# Altium PCB CPU-board-multi-ver3.PcbDoc (part 1 of 3)
Units mil, origin at the board's own origin, x right, y up, seen from the top; angles counter-clockwise.
Board outline 3937 x 2607 mil, 6 copper layers (L1, Power, L2, L3, CommonGND, L4), stack 84 mil thick; 298 components, 216 nets, 1009 pads, 421 vias.
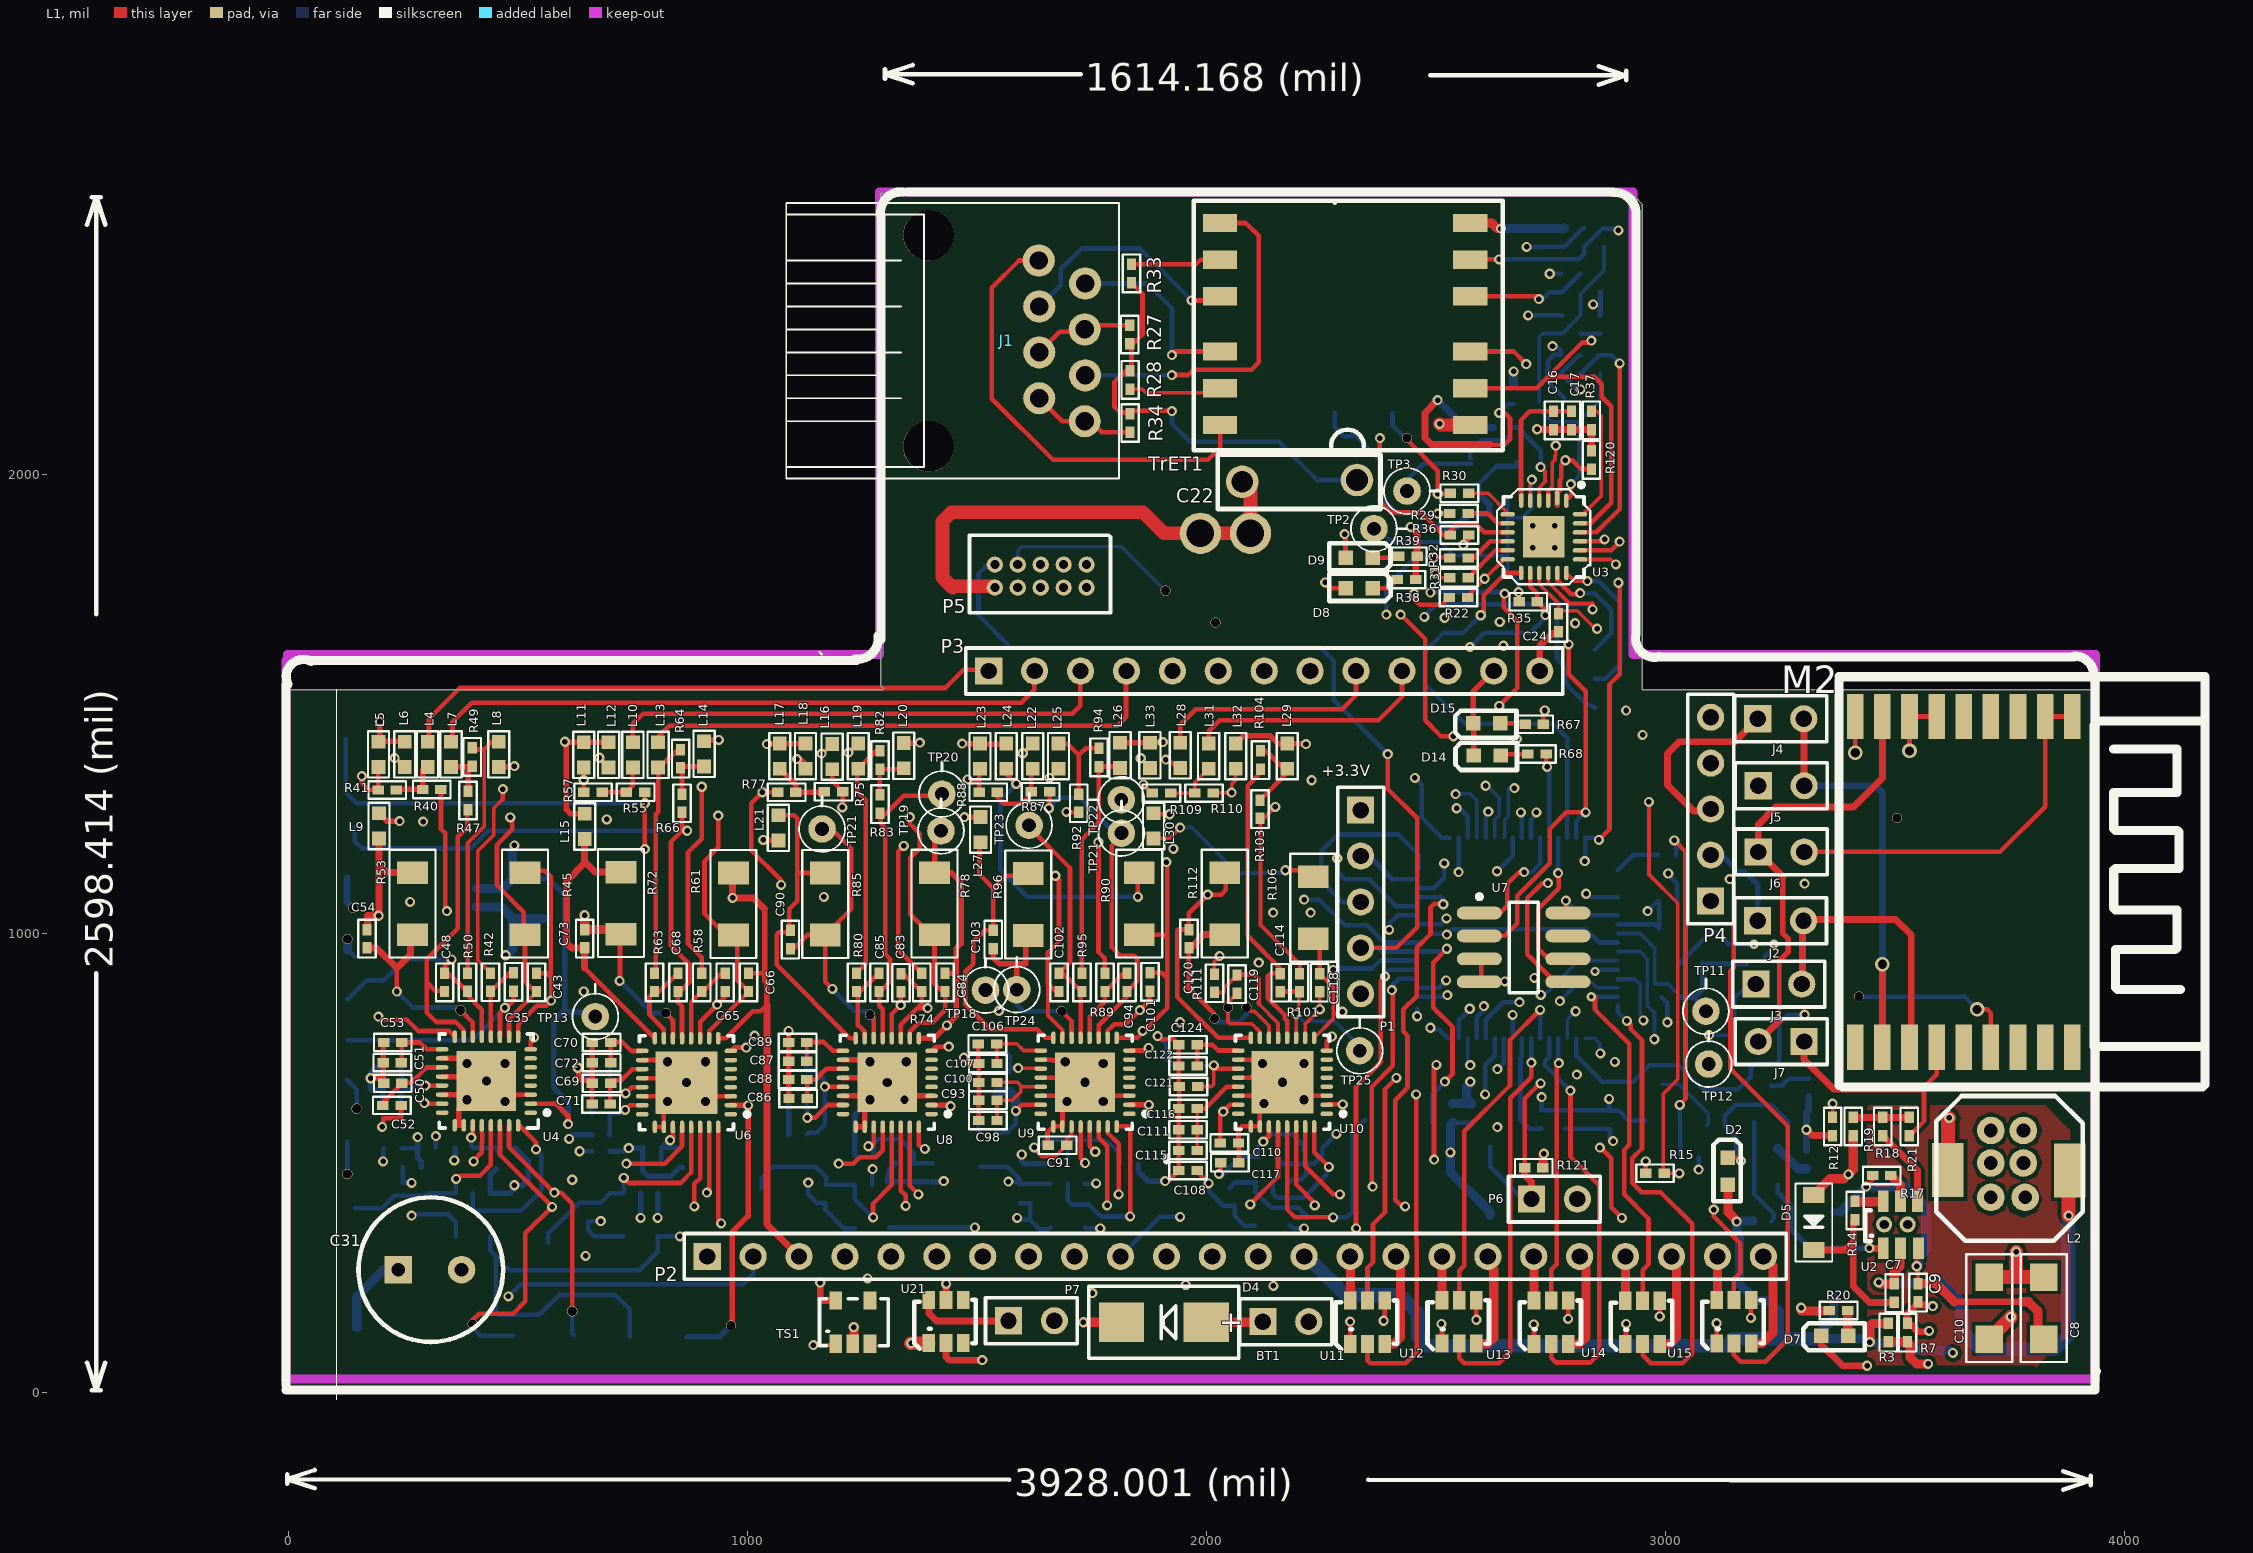
[diagram p0: L1 view]
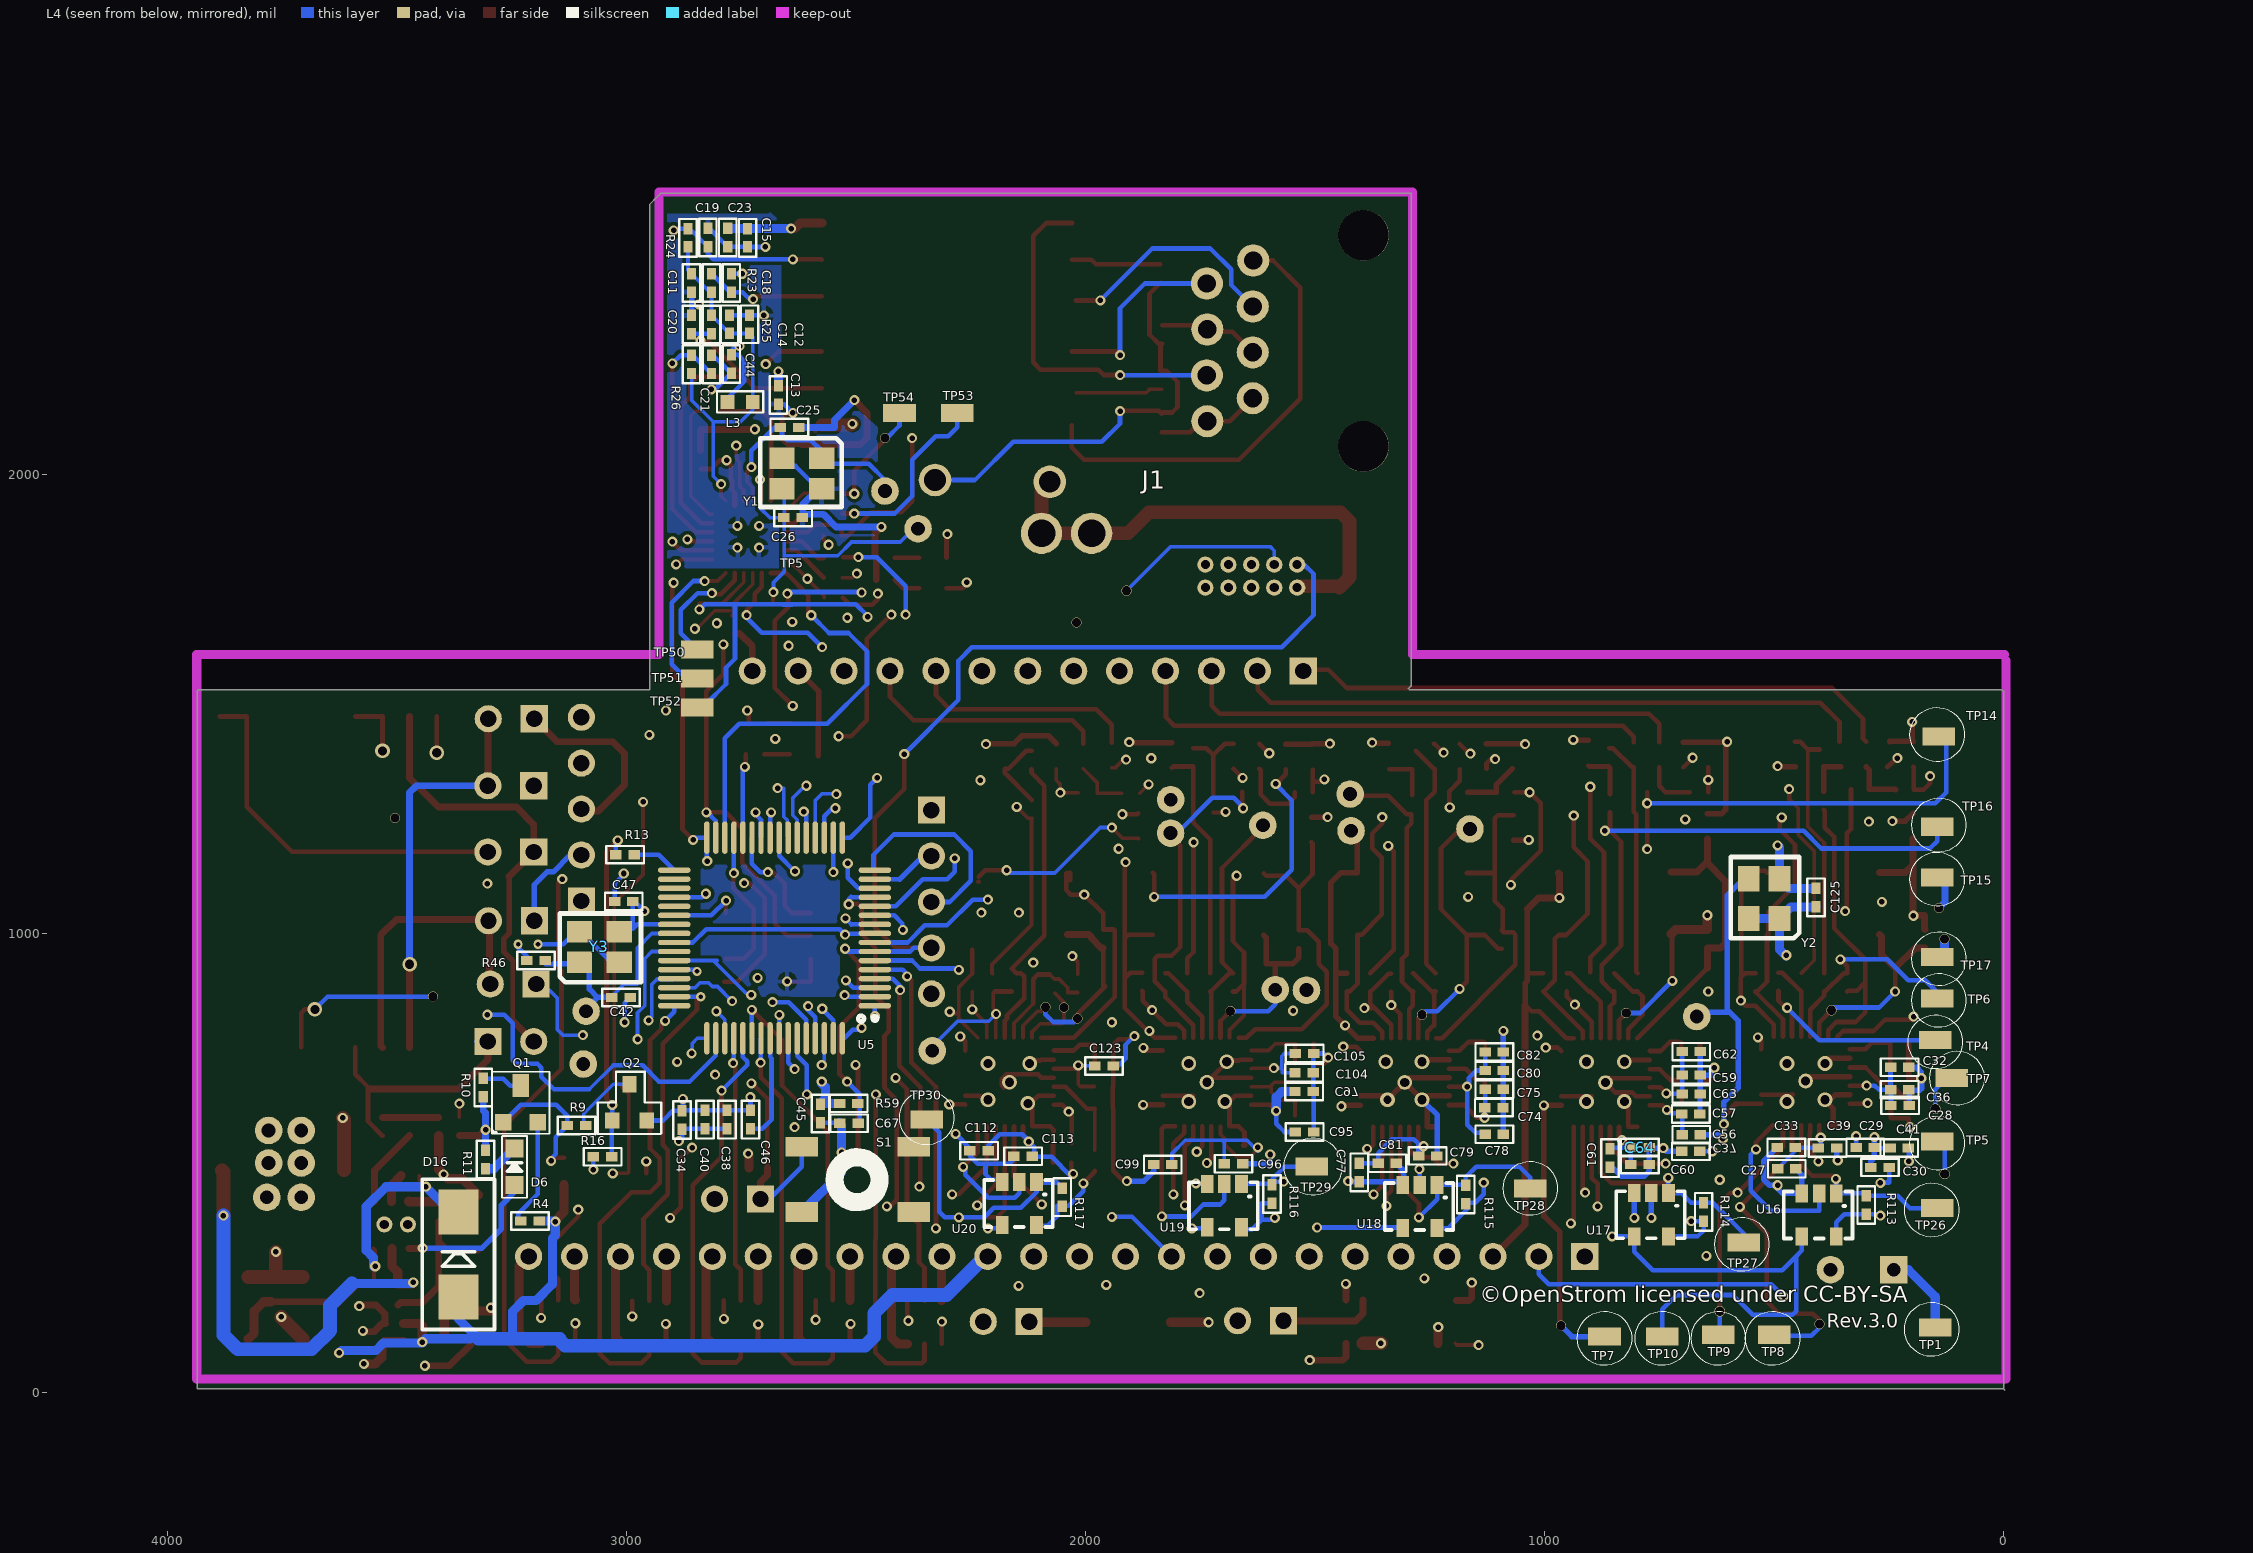
[diagram p1: L4 view, seen from below]
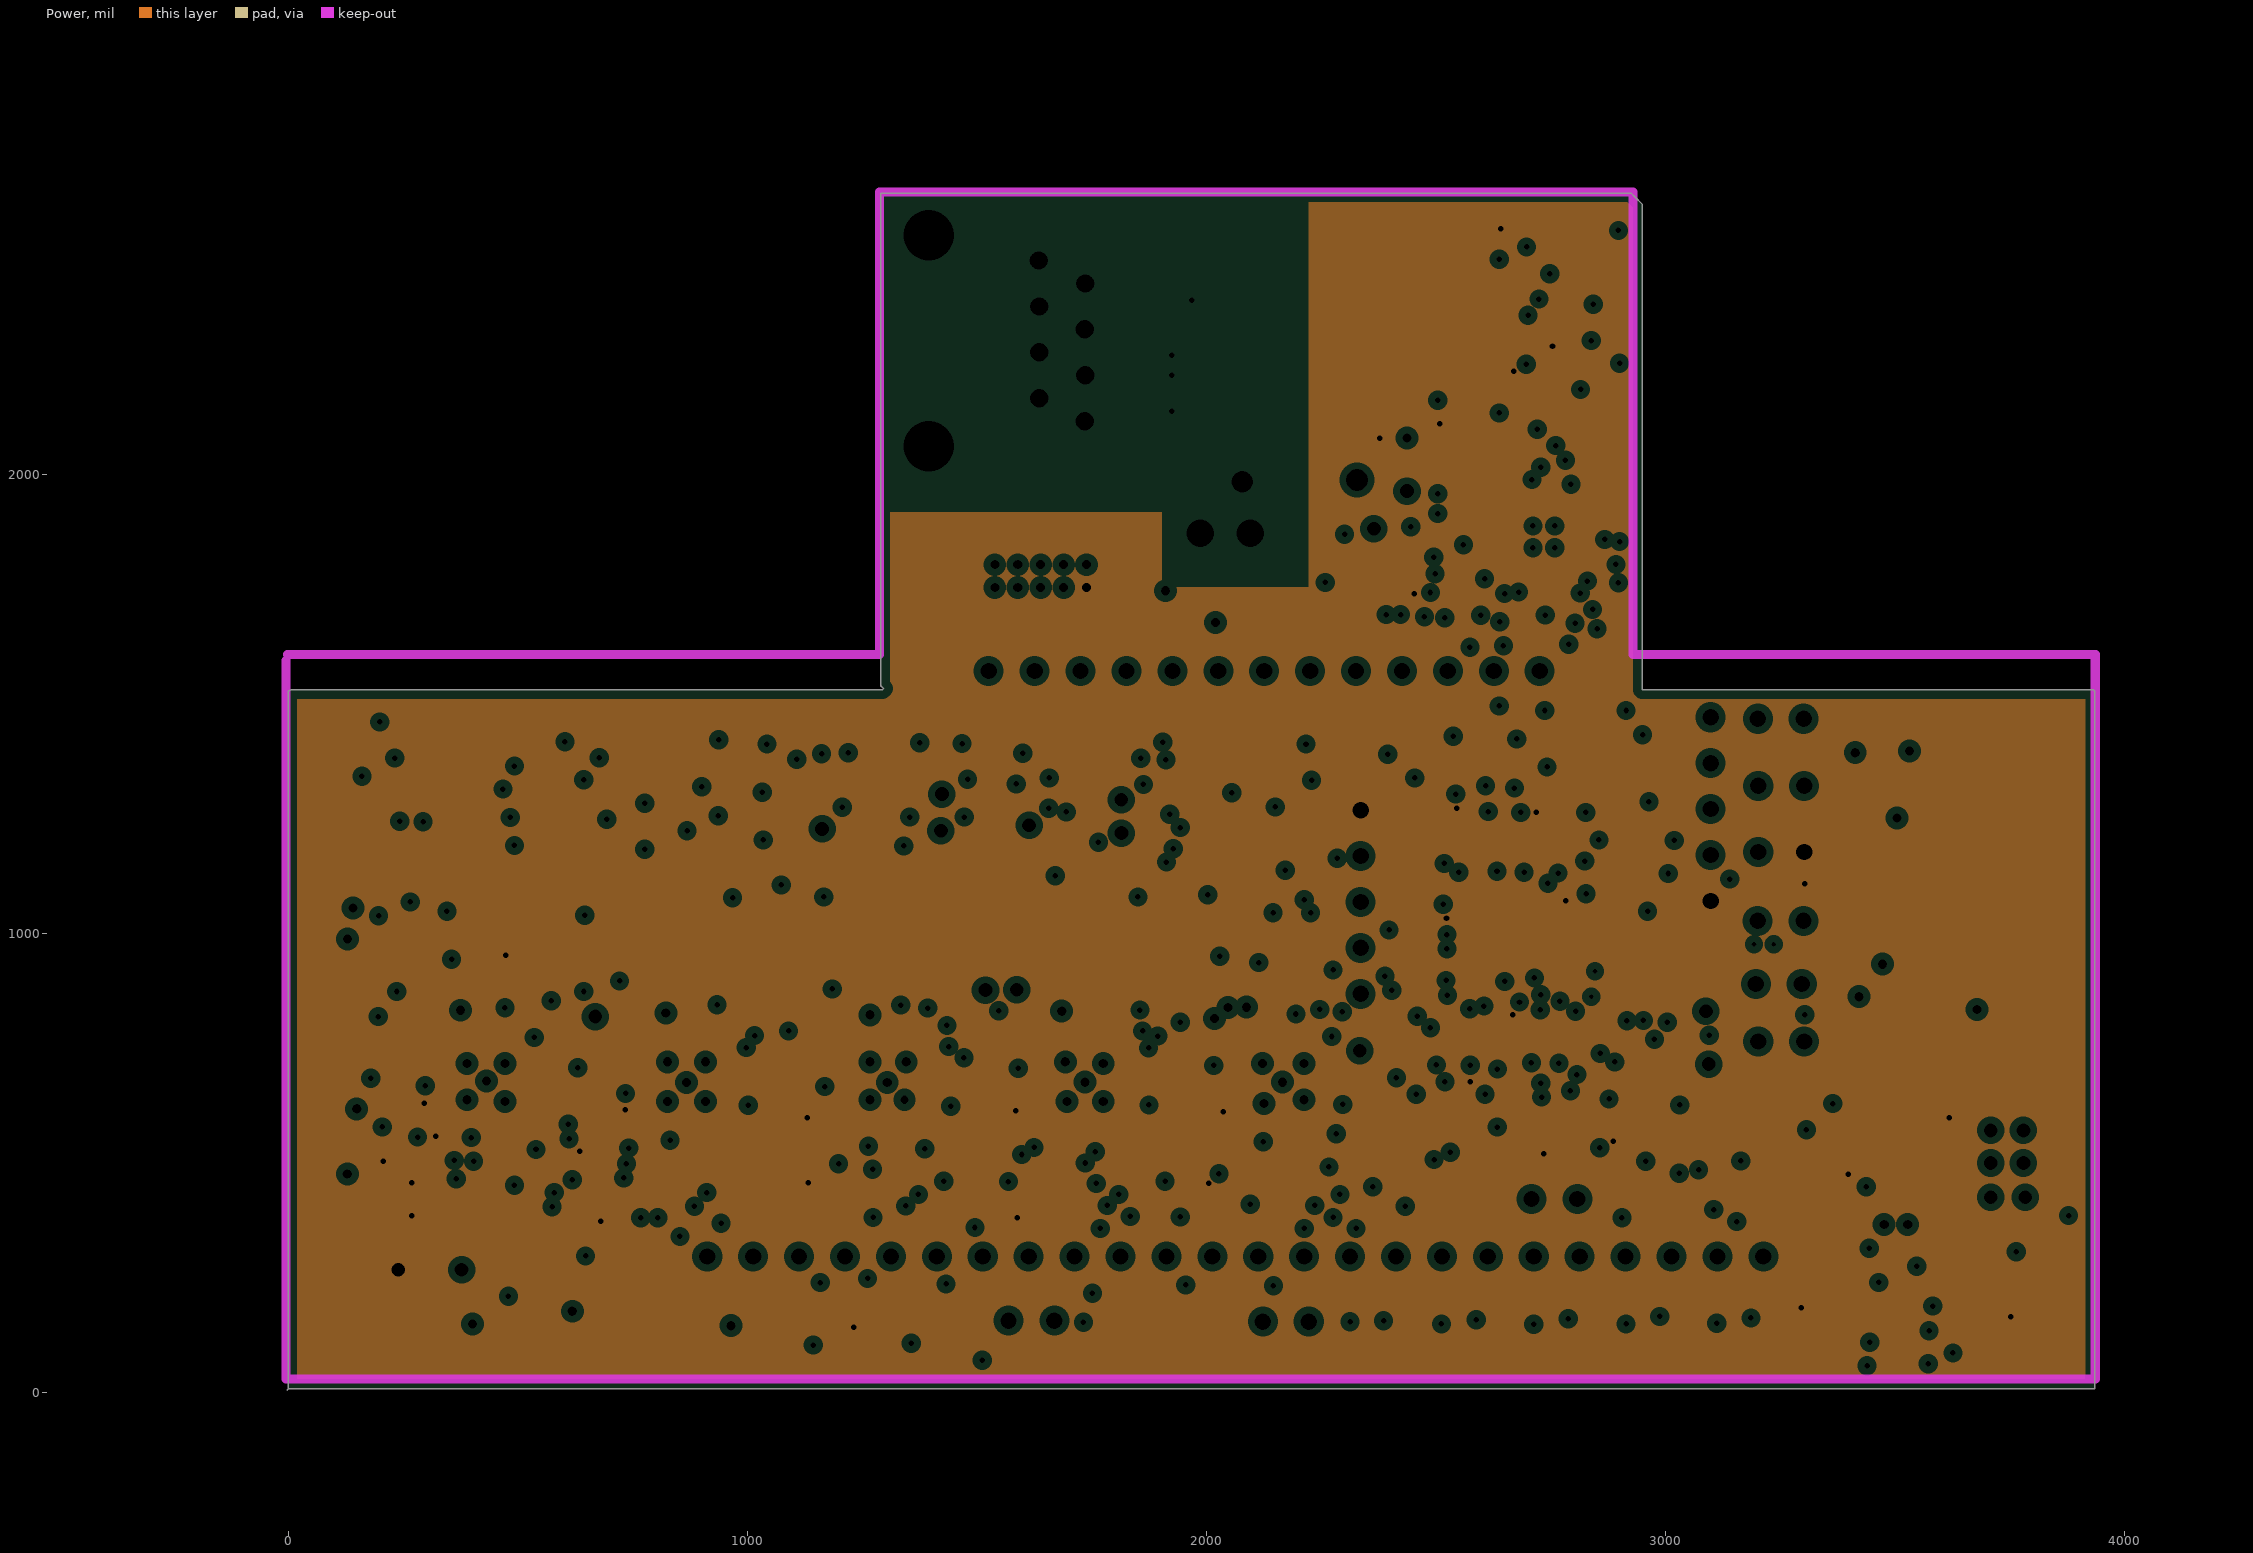
[diagram p2: Power, clearances drawn from the general rule]
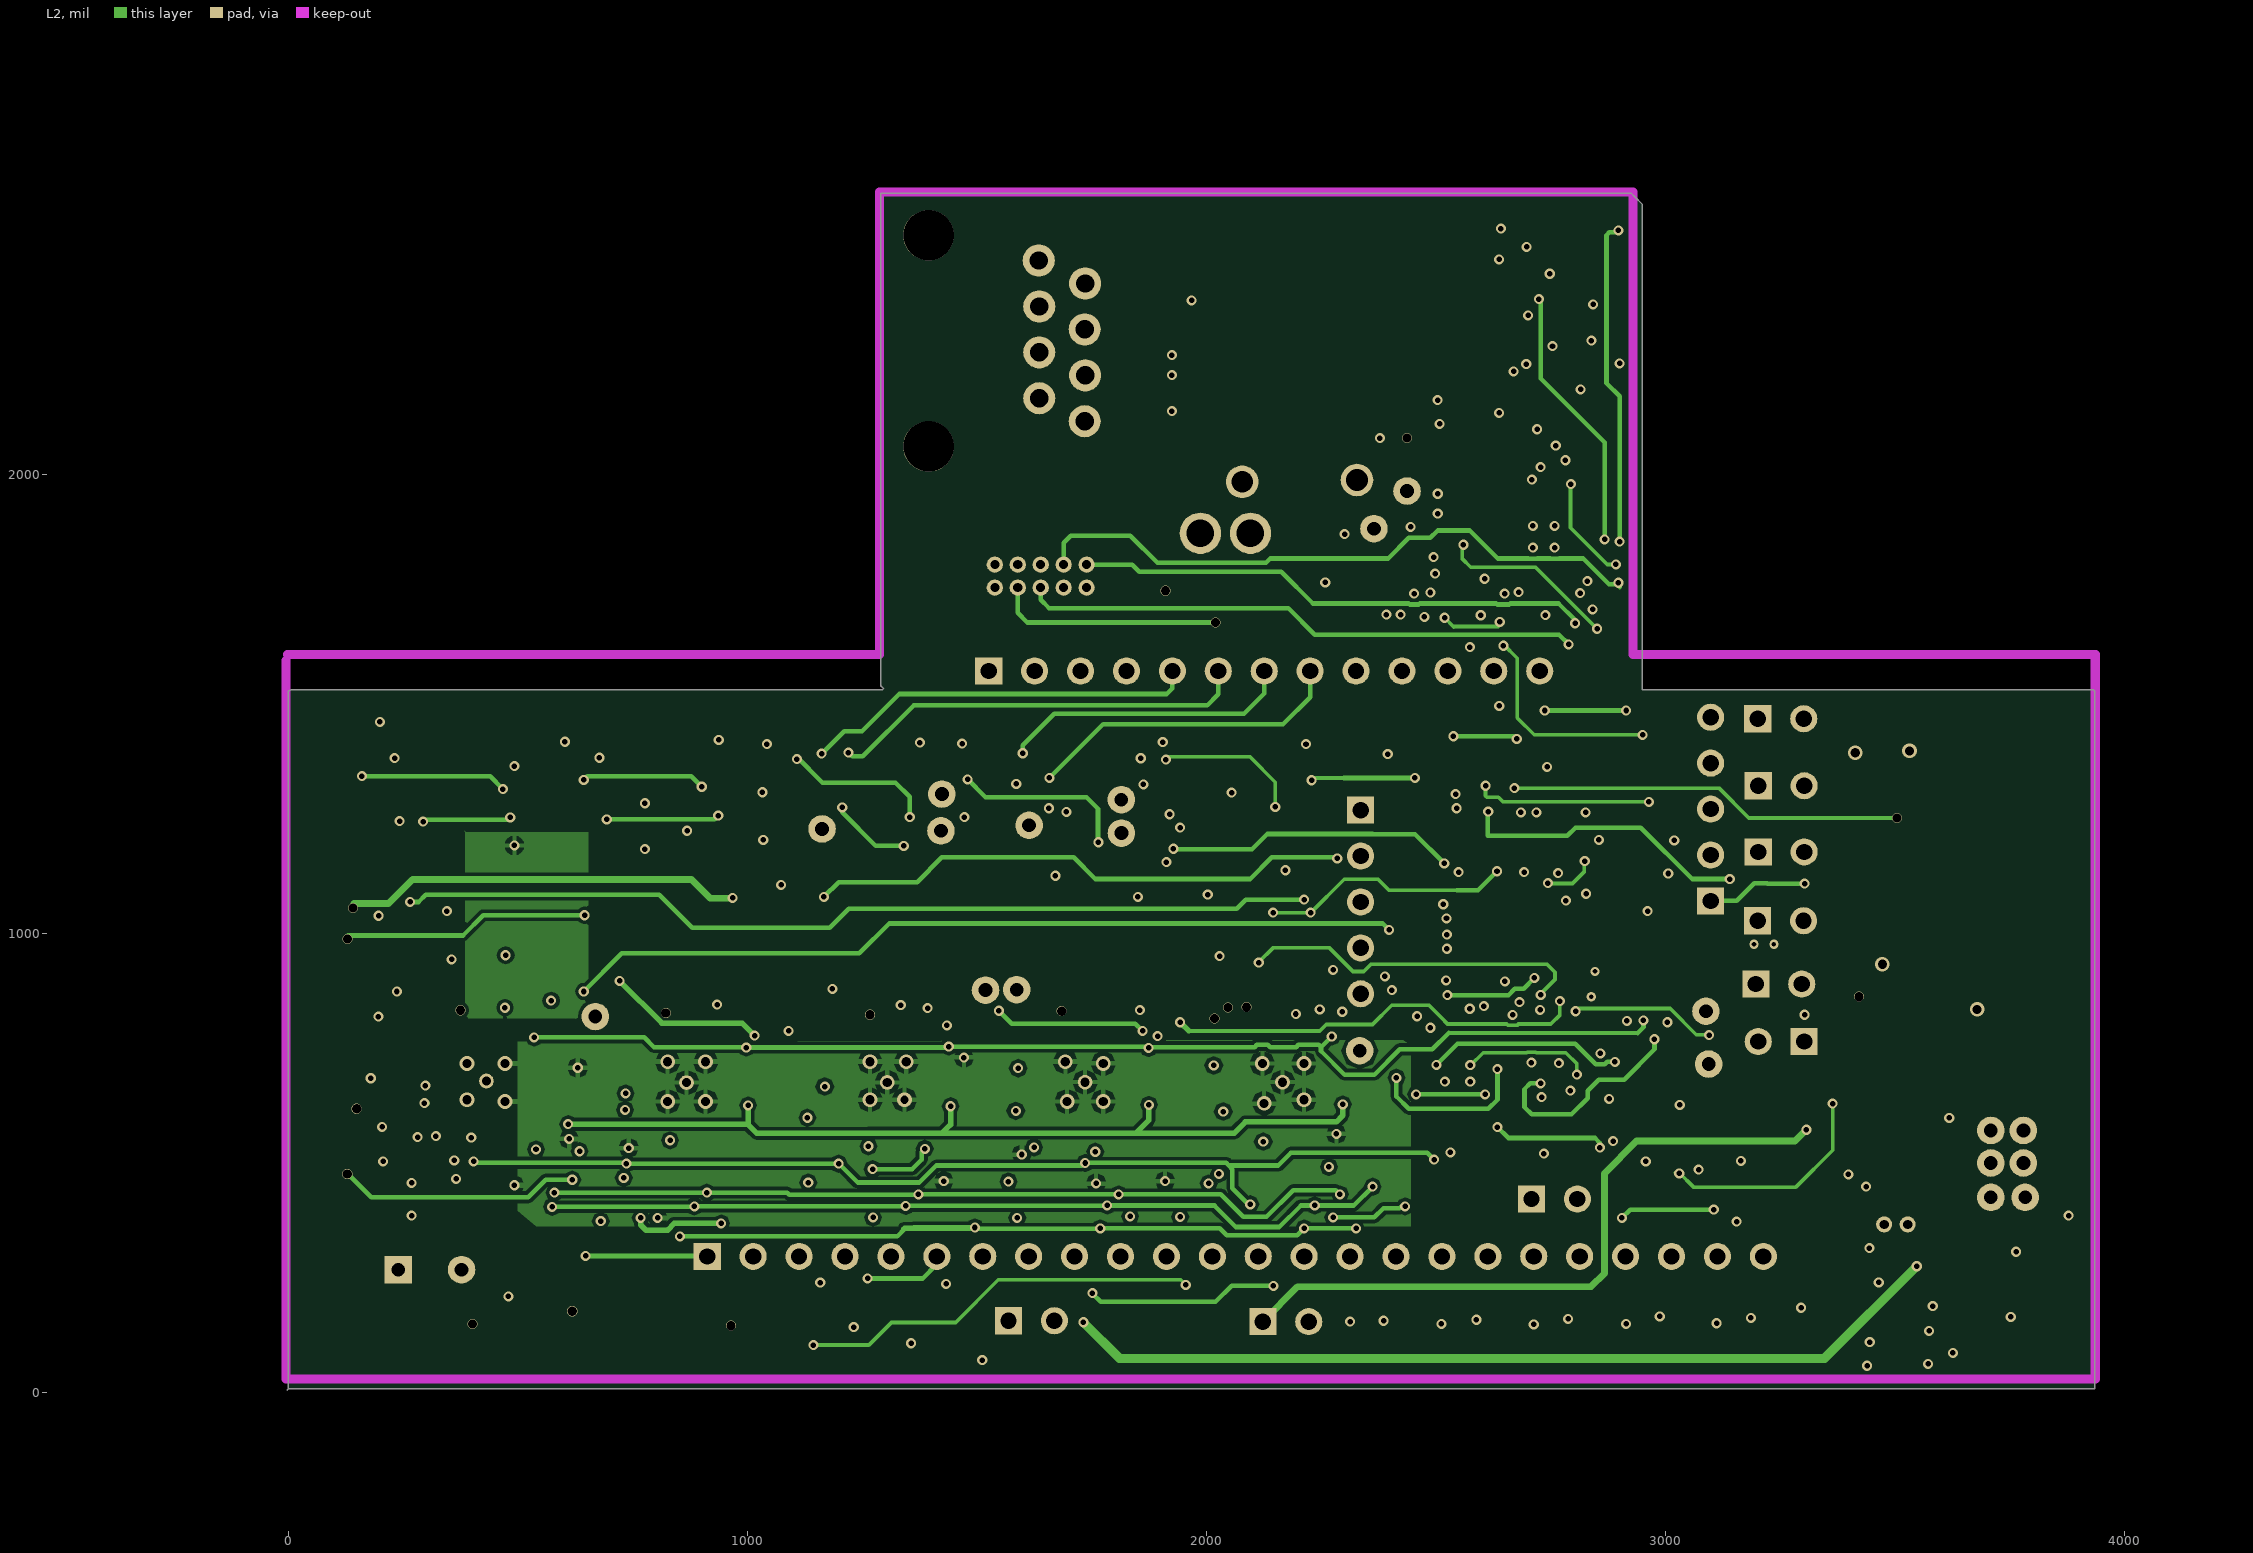
[diagram p3: L2]
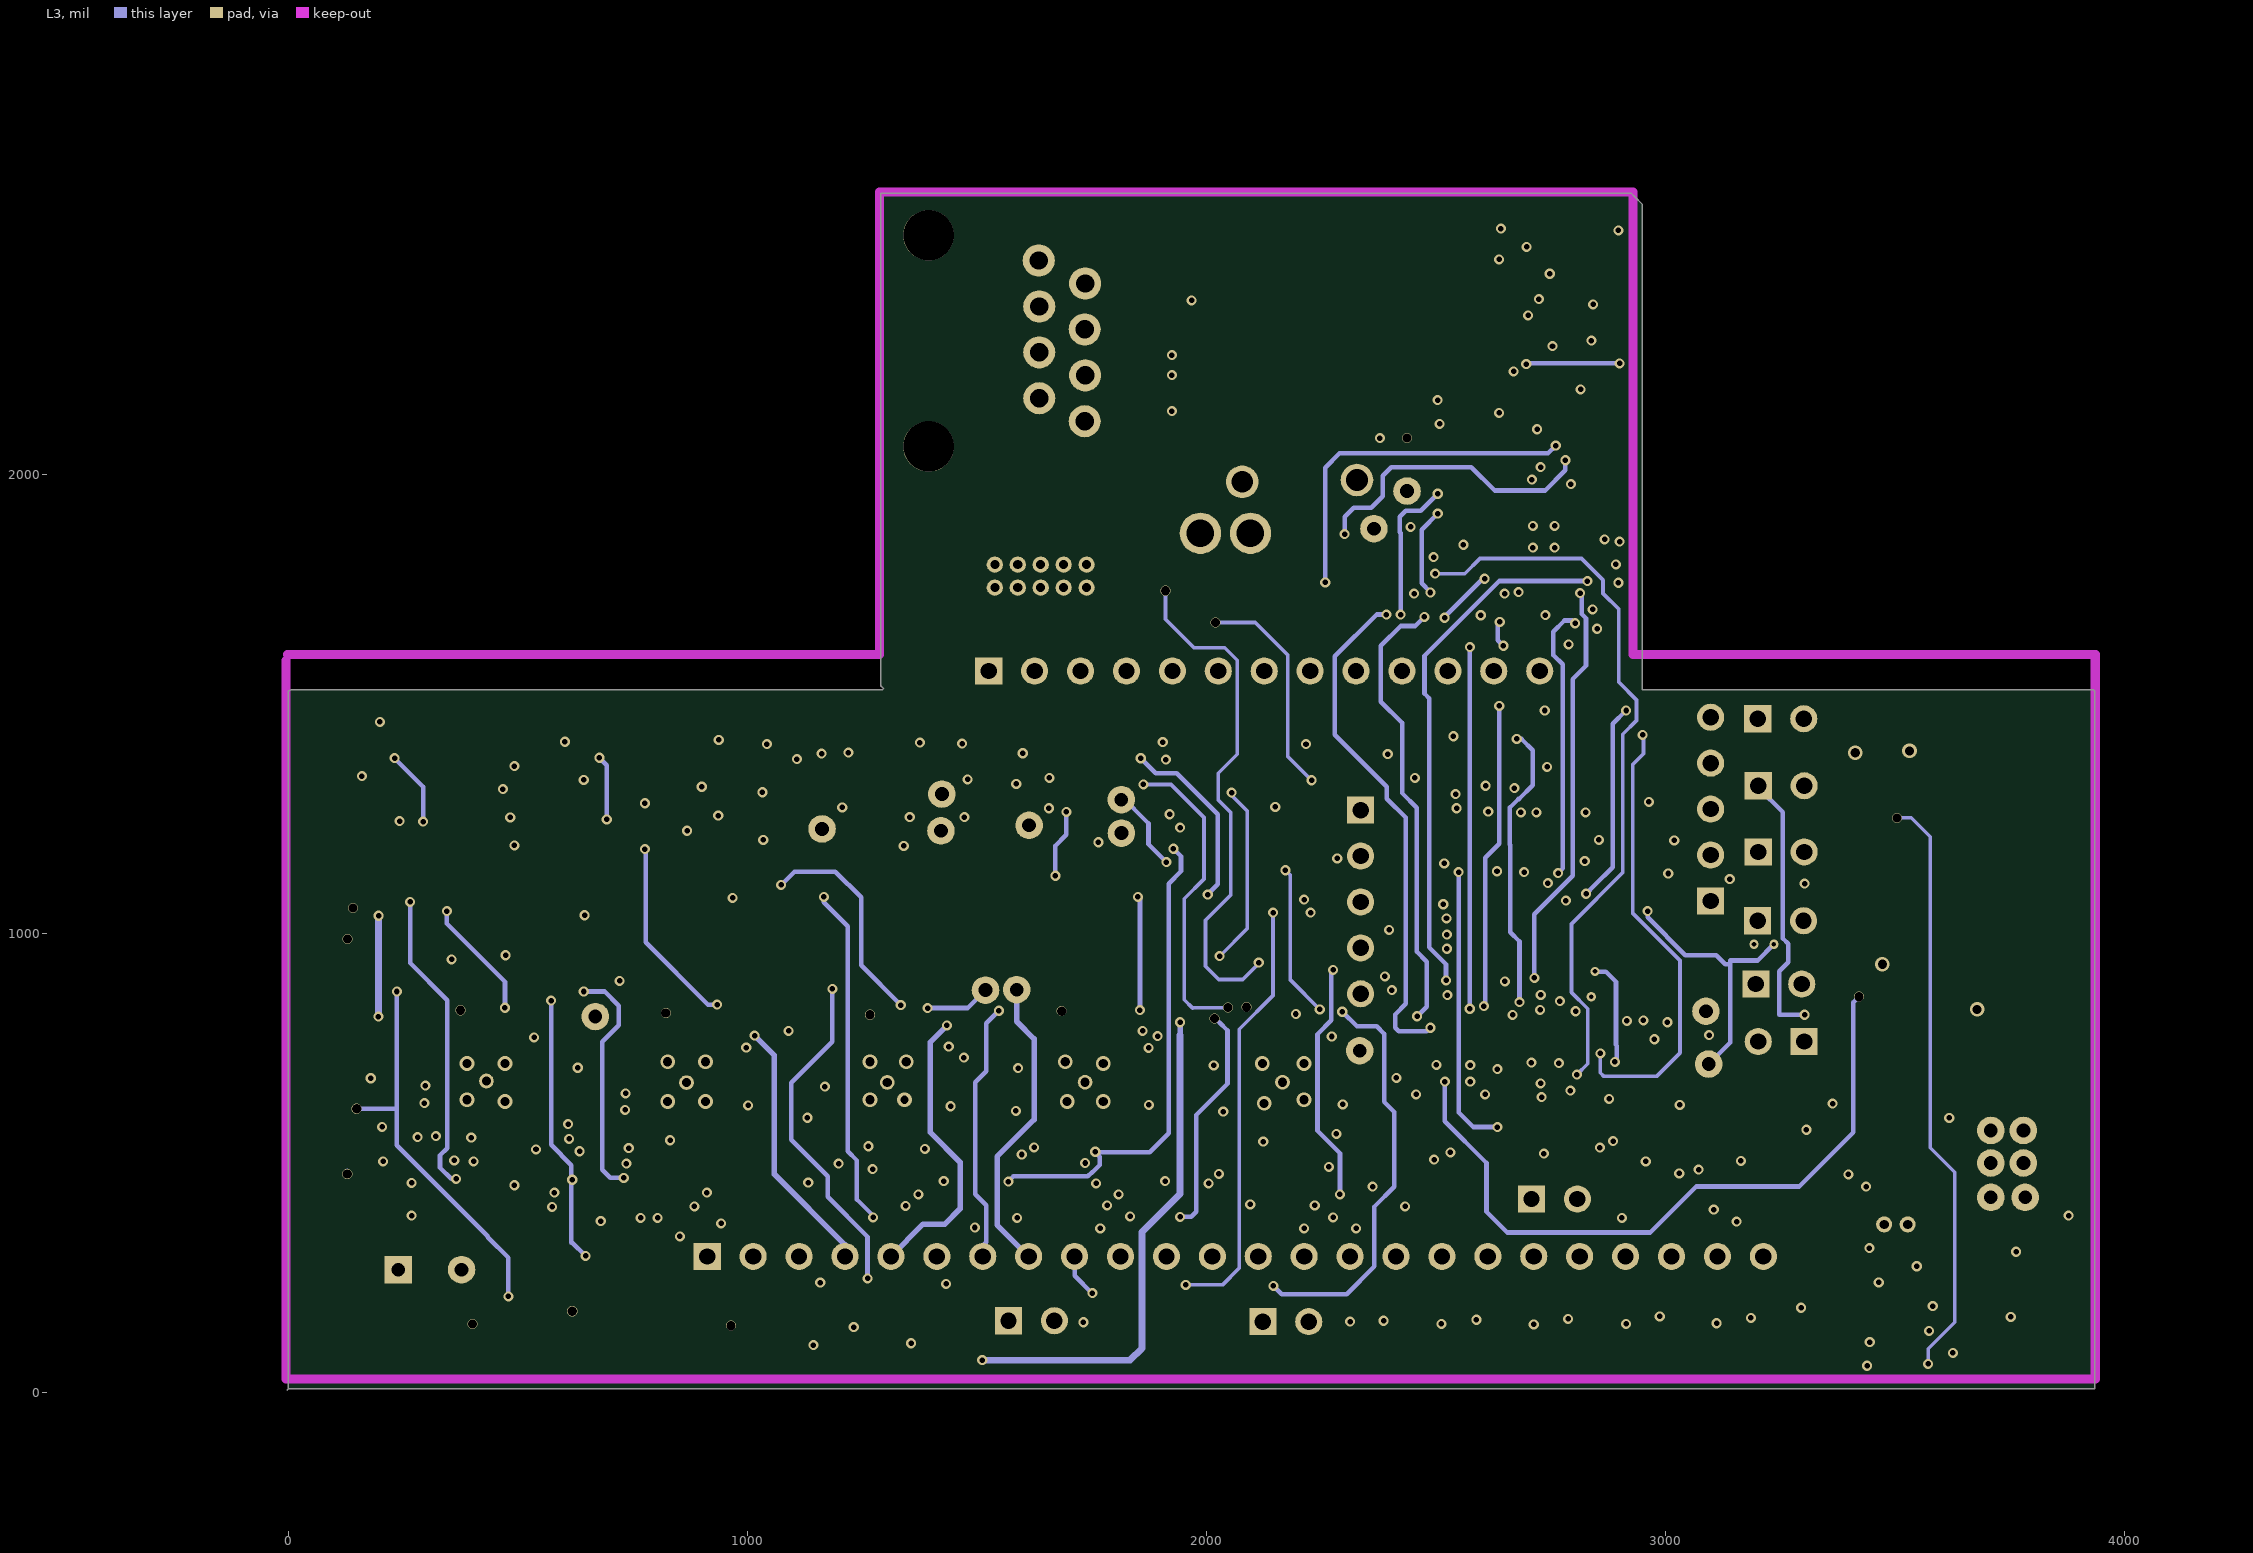
[diagram p4: L3]
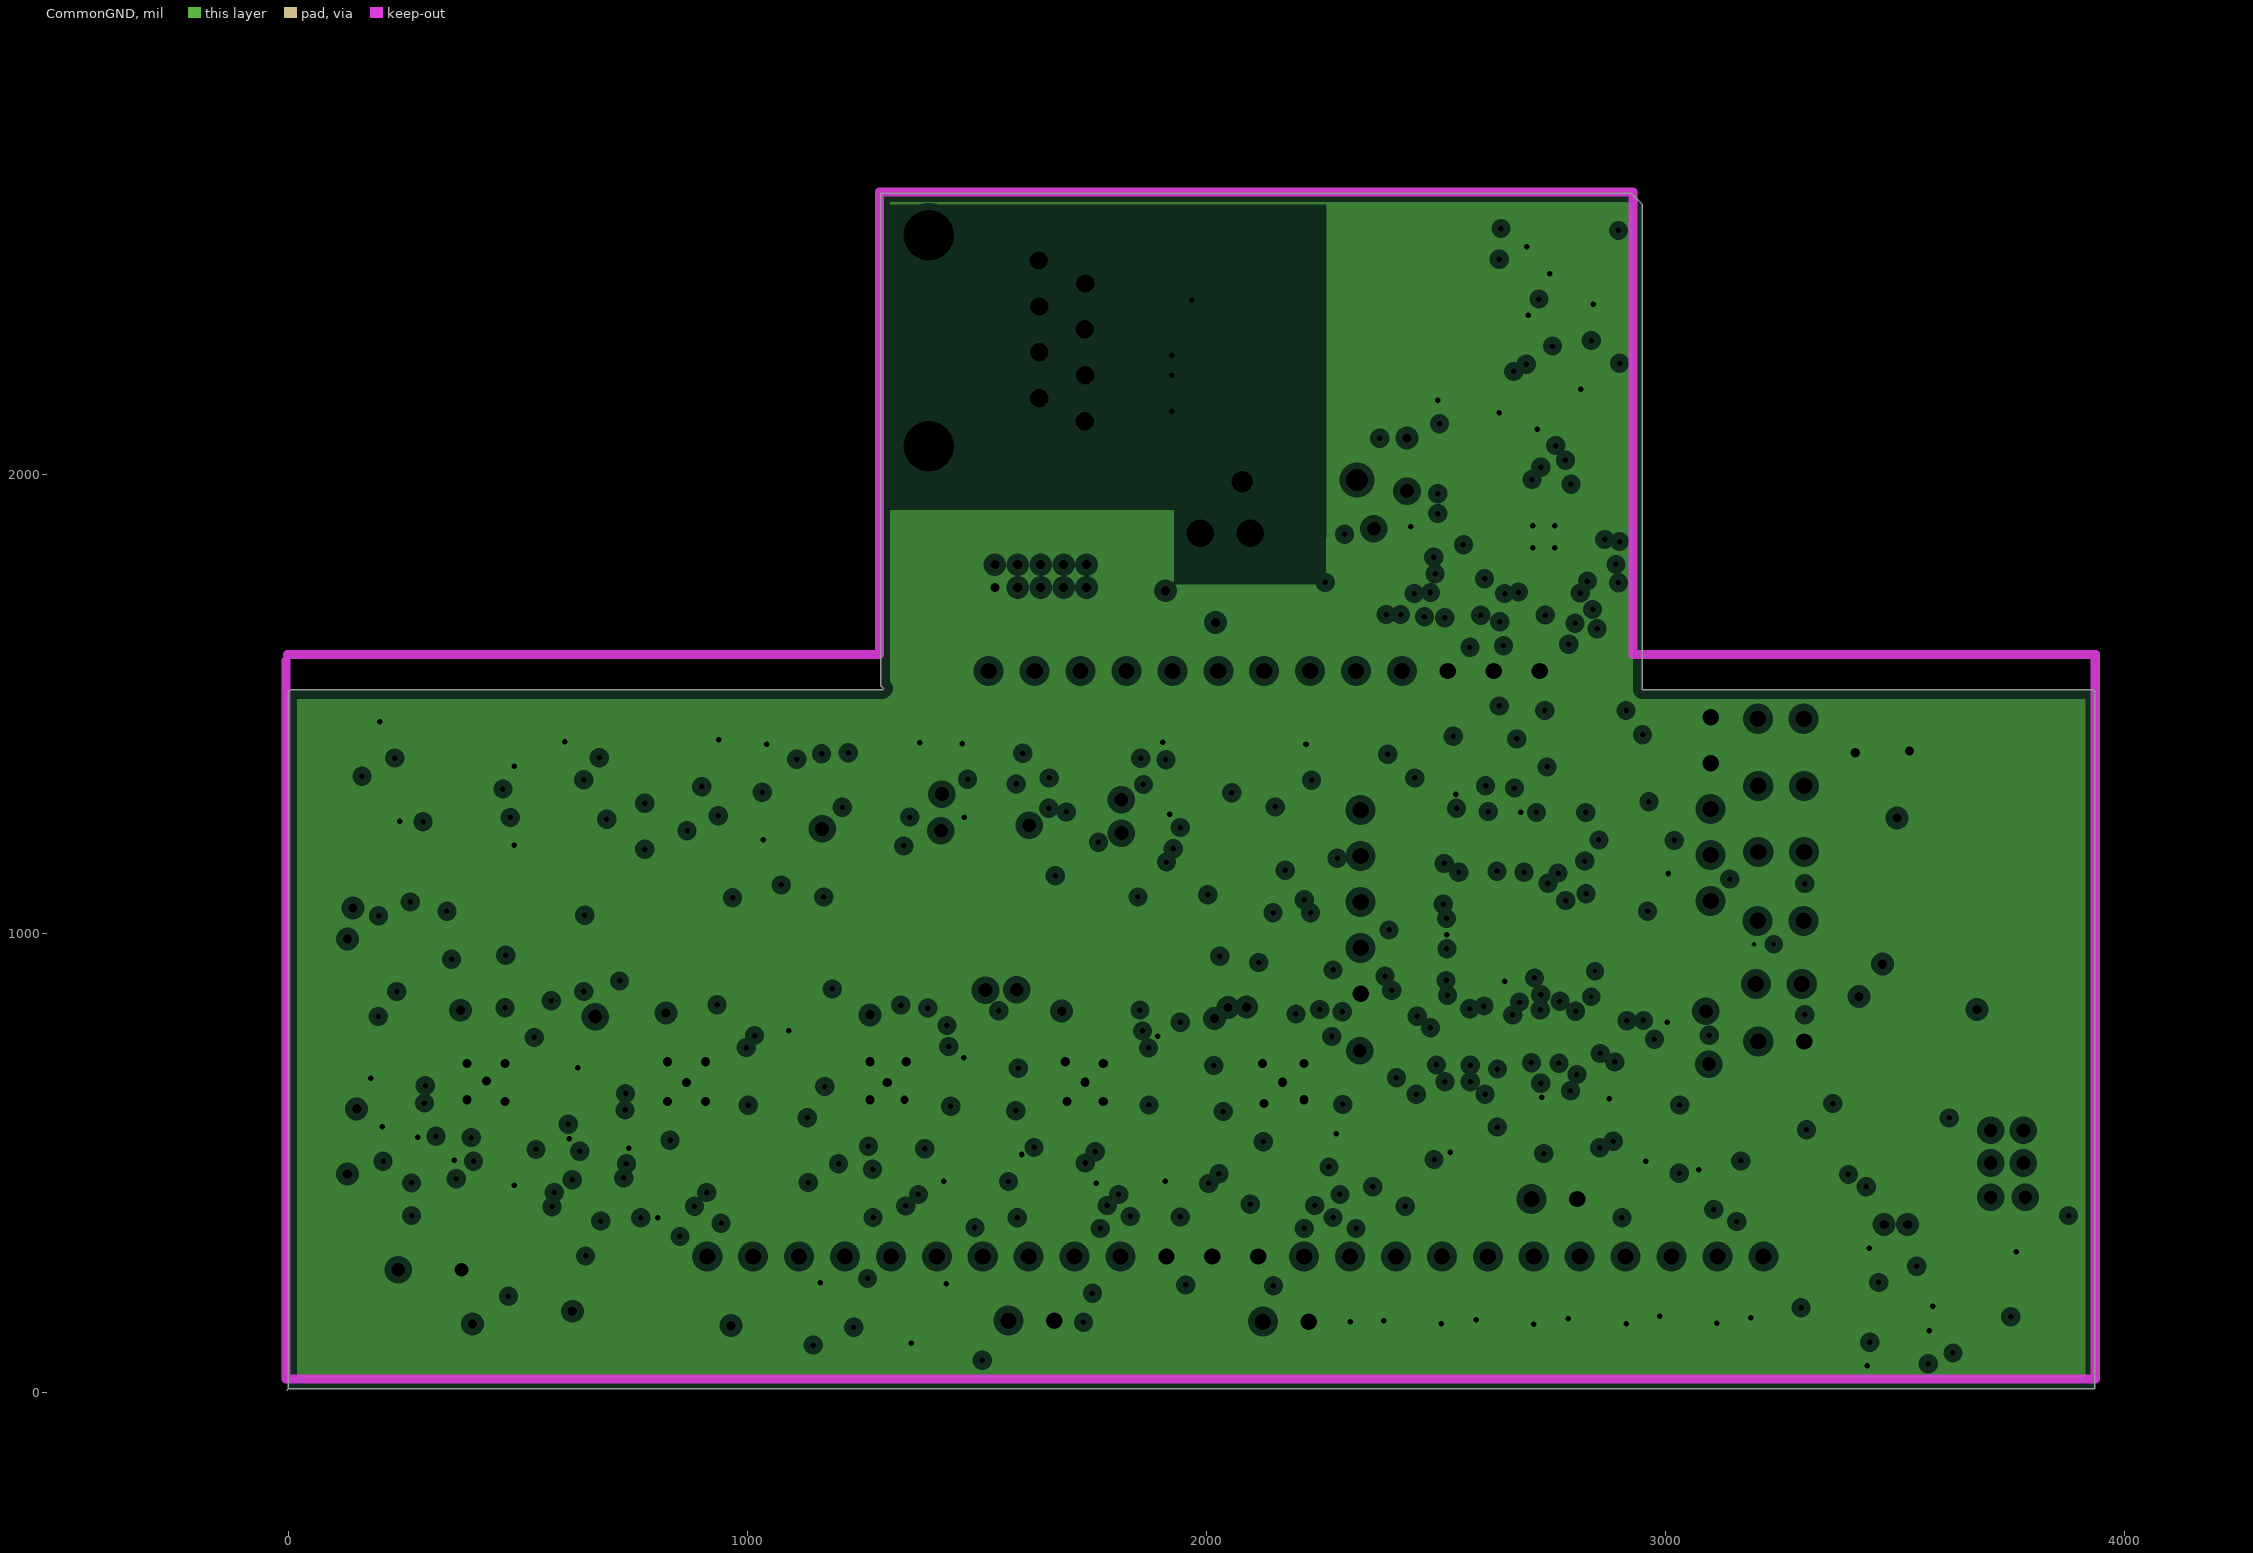
[diagram p5: CommonGND, clearances drawn from the general rule]

## Layer stack, top to bottom
L1: signal copper 1.4
Dielectric: core 12.6, FR-4, Dk 4.8
Power: plane copper 1.4, net VCC=3.3V
Dielectric: prepreg 12.6, FR-4, Dk 4.8
L2: signal copper 1.4
Dielectric: core 12.6, FR-4, Dk 4.8
L3: signal copper 1.4
Dielectric: prepreg 25.2, FR-4, Dk 4.8
CommonGND: plane copper 1.4, net GND
Dielectric: core 12.6, FR-4, Dk 4.8
L4: signal copper 1.4

## Board outline
6.13,1530.53 1294.13,1530.53 1297.13,1533.53 1291.13,1539.53 1291.13,2612.53 2925.13,2612.53 2934.13,2603.53 2949.13,2588.53 2949.13,1530.53 3932.13,1530.53 3935.13,1527.53 3935.13,8.53 1.13,8.53 -1.87,5.53 0.13,7.53 0.13,1527.53

## Design rules (kind name [scope] priority, off if disabled: settings)
Clearance [All] p1: gap=7.8
HoleSize [All] p1: absolutevalues=TRUE maxlimit=300 minlimit=1 maxpercent=80.000 minpercent=20.000
PlaneClearance [All] p1: clearance=15
PlaneConnect [All] p1: planeconnectstyle=Relief reliefexpansion=10 reliefentries=4 reliefconductorwidth=5 reliefairgap=5
PolygonConnect [All] p1: connectstyle=Relief reliefconductorwidth=10 reliefentries=4 polygonreliefangle="90 Angle" airgapwidth=10
RoutingVias ThruVia [((StartLayer='L1')and (StopLayer='L4')) or ((StartLayer='L2')and (StopLayer='L3'))  or ((StartLayer='L1-2')and (StopLayer='L3')) or ((StartLayer='L1')and (StopLayer='L2'))or  ((StartLayer='L3')and (StopLayer='L4')) or ((StartLayer='L1')and (StopLayer='L3')) or ((StartLayer='L1')and (StopLayer='L1-2')) or ((StartLayer='L4')and (StopLayer='L3')) or ((StartLayer='L1-2')and (StopLayer='L4')) or ((StartLayer='L2')and (StopLayer='L4')) or ((StartLayer='L1-2')and (StopLayer='L2'))] p1: holewidth=12 width=22 viastyle="Through Hole" minholewidth=8 minwidth=20 maxholewidth=40 maxwidth=55
SMDNeckDown [All] p1: percent=40.000
SolderMaskExpansion [All] p1: expansion=4
Width [All] p1: maxlimit=50 minlimit=8 preferedwidth=10
25 further rules are at their usual default settings.

## Classes and differential pairs
component class CPU-board-Sheet3-multi: C91 C93 C94 C95 C96 C97 C98 C99 C100 C101 C102 C103 C104 C105 C106 C107 C108 C110 C111 C112 C113 C114 C115 C116 C117 C118 C119 C120 C121 C122 C123 C124 L22 L23 L24 L25 L26 L27 L28 L29 L30 L31 L32 L33 P7 R87 R88 R89 R90 R92 R94 R95 R96 R101 R103 R104 R106 R109 R110 R111 R112 R116 R117 TP22 TP23 TP24 TP25 U9 U10 U19 U20
component class CPU-board-Sheet2-multi: C27 C28 C29 C30 C31 C32 C33 C34 C35 C36 C37 C38 C39 C40 C41 C42 C43 C44 C45 C46 C47 C48 C50 C51 C52 C53 C54 C56 C57 C59 C60 C61 C62 C63 C64 C65 C66 C67 C68 C69 C70 C71 C72 C73 C74 C75 C77 C78 C79 C80 C81 C82 C83 C84 C85 C86 C87 C88 C89 C90 C125 D14 D15 J2 J4 J5 J6 J7 L4 L5 L6 L7 L8 L9 L10 L11 L12 L13 L14 L15 L16 L17 L18 L19 L20 L21 P1 P2 P3 P4 R40 R41 R42 R45 R46 R47 R49 R50 R53 R55 R57 R58 R59 R61 R63 R64 R66 R67 R68 R72 R74 R75 R77 R78 R80 R82 R83 R85 R113 R114 R115 TP11 TP12 TP18 TP19 TP20 U4 U5 U6 U7 U8 U11 U12 U13 U14 U15 U16 U17 U18 Y3
component class CPU-board-Sheet1-multi: BT1 C7 C8 C9 C10 C11 C12 C13 C14 C15 C16 C17 C18 C19 C20 C21 C22 C23 C25 C26 D2 D5 D7 D8 D9 J1 L2 L3 Q1 Q2 R3 R4 R7 R9 R10 R11 R12 R13 R14 R15 R16 R17 R18 R19 R20 R21 R22 R23 R24 R25 R26 R27 R28 R29 R30 R31 R32 R33 R34 R36 R37 R38 R39 TP2 TP3 TrET1 U2 U3

## Components (designator, comment, footprint, x,y, rotation, side; value= is the part's Value field where it differs from the comment)
BT1 "9.0V" BAT-2 2173.13,154.53 r0 top
C7 "1uF/6.3V" 0402C-GENERIC 3498.13,236.53 r270 top
C8 "22uF" 1206C-GENERIC 3824.13,116.53 r90 top
C9 "100nF/35V" 0402C-GENERIC 3550.13,237.53 r270 top
C10 "22uF/6.3V" 1206C-GENERIC 3705.13,116.53 r90 top
C11 "100nF/35V" 0402C-GENERIC 2858.33,2436.66 r270 bottom
C12 "10uF/6.3V" 0402C-GENERIC 2732.35,2306.74 r90 bottom
C13 "100nF/35V" 0402C-GENERIC 2669.35,2192.57 r270 bottom
C14 "100nF/35V" 0402C-GENERIC 2775.65,2306.74 r90 bottom
C15 "10uF/6.3V" 0402C-GENERIC 2736.28,2535.09 r270 bottom
C16 "1uF/16V" 0402C-GENERIC 2755.97,2097.45 r90 top
C17 "470pF" 0402C-GENERIC 2795.34,2137.45 r270 top
C18 "10pF/50V" 0402C-GENERIC 2771.72,2396.66 r90 bottom
C19 "10pF/50V" 0402C-GENERIC 2822.9,2495.72 r90 bottom
C20 "10pF/50V" 0402C-GENERIC 2858.33,2306.11 r90 bottom
C21 "10pF/50V" 0402C-GENERIC 2815.02,2219.5 r90 bottom
C22 "Comment" "HiVoltCapacitor 470pF/6kV" 2328.13,1987.46 r180 top
C23 "22nF/16V" 0402C-GENERIC 2779.59,2535.72 r270 bottom
C24 "" 0402C-GENERIC 2767.13,1696.53 r270 top
C25 "18pF/6.3V" 0402C-GENERIC 2665.42,2102.02 r180 bottom
C26 "18pF/6.3V" 0402C-GENERIC 2657.13,1905.53 r180 bottom
C27 "100nF/10V" 0402C-GENERIC 493.13,487.53 r180 bottom
C28 "1uF/6.3V" 0402C-GENERIC 246.13,625.53 r180 bottom
C29 "150pF/10V" 0402C-GENERIC 322.13,533.53 r180 bottom
C30 "100nF" 0402C-GENERIC 250.13,490.53 r0 bottom
C31 "470uF/6.3V" 470uF/6.3v 240.16,267.72 r0 top
C32 "150pF/10V" 0402C-GENERIC 247.13,708.53 r180 bottom
C33 "150pF/10V" 0402C-GENERIC 454.13,533.53 r0 bottom
C34 "" 0402C-GENERIC 2879.13,613.53 r270 bottom
C35 "10n/16V" 0402C-GENERIC 491.13,914.53 r270 top
C36 "100nF/10V" 0402C-GENERIC 247.13,659.53 r180 bottom
C37 "100nF/6.3V" 0402R-TBD 702.13,525.53 r180 bottom
C38 "Comment" 0402C-GENERIC 2781.13,574.53 r90 bottom
C39 "4.7uF/16V" 0402C-GENERIC 404.13,532.53 r180 bottom
C40 "100nF/6.3V" 0402C-GENERIC 2829.13,614.53 r270 bottom
C41 "100nF/6.3V" 0402C-TBD 248.13,532.53 r180 bottom
C42 "27pF/6.3V" 0402C-GENERIC 3032.13,860.53 r180 bottom
C43 "10n/16V" 0402C-GENERIC 541.13,873.53 r90 top
C44 "100nF/6.3V" 0402C-TBD 2771.72,2220.13 r90 bottom
C45 "100nF/6.3V" 0402C-TBD 2577.5,587.9 r90 bottom
C46 "" 0402C-GENERIC 2730.13,574.53 r90 bottom
C47 "27pF/6.3V" 0402C-GENERIC 2986.13,1069.53 r0 bottom
C48 "10n/16V" 0402C-GENERIC 341.13,913.53 r270 top
C50 "150pF" 0402C-GENERIC 248.13,673.53 r180 top
C51 "150pF" 0402C-GENERIC 247.13,718.53 r180 top
C52 "100nF" 0402C-GENERIC 246.13,625.53 r180 top
C53 "100nF" 0402C-GENERIC 248.13,762.53 r180 top
C54 "10n/16V" 0402C-GENERIC 172.13,1008.53 r270 top
C56 "150pF/10V" 0402C-GENERIC 701.13,561.53 r180 bottom
C57 "100nF" 0402C-GENERIC 702.13,606.53 r180 bottom
C59 "1uF/6.3V" 0402C-GENERIC 701.13,691.53 r180 bottom
C60 "100nF" 0402C-GENERIC 813.13,496.53 r180 bottom
C61 "150pF/10V" 0402C-GENERIC 858.13,530.53 r270 bottom
C62 "150pF/10V" 0402C-GENERIC 701.13,742.53 r180 bottom
C63 "100nF" 0402C-GENERIC 701.13,650.53 r180 bottom
C64 "1uF/6.3V" 0402C-GENERIC 813.13,533.53 r180 bottom
C65 "10n/16V" 0402C-GENERIC 952.13,913.53 r270 top
C66 "10n/16V" 0402C-GENERIC 1003.13,873.53 r90 top
C67 ".1uF" 0402C-TBD 2495.43,586.61 r0 bottom
C68 "10n/16V" 0402C-GENERIC 849.13,873.53 r90 top
C69 "150pF" 0402C-GENERIC 703.13,673.53 r180 top
C70 "150pF" 0402C-GENERIC 703.13,762.53 r180 top
C71 "100nF" 0402C-GENERIC 702.13,628.53 r180 top
C72 "100nF" 0402C-GENERIC 703.13,718.53 r180 top
C73 "10n/16V" 0402C-GENERIC 646.13,968.53 r90 top
C74 "150pF/10V" 0402C-GENERIC 1131.13,620.53 r180 bottom
C75 "100nF" 0402C-GENERIC 1130.13,660.53 r180 bottom
C77 "100nF" 0402C-GENERIC 1404.13,499.53 r270 bottom
C78 "Comment" 0402C-GENERIC 1130.13,562.53 r180 bottom
C79 "150pF/10V" 0402C-GENERIC 1275.13,515.53 r180 bottom
C80 "150pF/10V" 0402C-GENERIC 1130.13,701.53 r180 bottom
C81 "1uF/6.3V" 0402C-GENERIC 1363.13,499.53 r180 bottom
C82 "100nF" 0402C-GENERIC 1130.13,741.53 r180 bottom
C83 "10n/16V" 0402C-GENERIC 1335.12,872.53 r90 top
C84 "10n/16V" 0402C-GENERIC 1431.13,873.53 r90 top
C85 "10n/16V" 0402C-GENERIC 1287.13,873.53 r90 top
C86 "150pF" 0402C-GENERIC 1131.13,640.53 r180 top
C87 "150pF" 0402C-GENERIC 1130.13,721.53 r180 top
C88 "100nF" 0402C-GENERIC 1130.13,681.53 r180 top
C89 "100nF" 0402C-GENERIC 1130.13,762.53 r180 top
C90 "10n/16V" 0402C-GENERIC 1094.13,1006.53 r270 top
C91 "100nF" 0402C-GENERIC 1696.13,538.53 r180 top
C93 "1uF/6.3V" 0402C-GENERIC 1544.13,636.53 r180 top
C94 "10n/16V" 0402C-GENERIC 1827.13,913.53 r270 top
C95 "100nF" 0402C-GENERIC 1543.13,567.53 r180 bottom
C96 "150pF/10V" 0402C-GENERIC 1698.13,498.53 r180 bottom
C97 "150pF/10V" 0402C-GENERIC 1544.13,655.53 r180 bottom
C98 "150pF/10V" 0402C-GENERIC 1504.13,592.53 r0 top
C99 "1uF/6.3V" 0402C-GENERIC 1812.13,496.53 r0 bottom
C100 "100nF" 0402C-GENERIC 1544.13,675.53 r180 top
C101 "10n/16V" 0402C-GENERIC 1877.13,874.53 r90 top
C102 "10n/16V" 0402C-GENERIC 1679.13,913.53 r270 top
C103 "10n/16V" 0402C-GENERIC 1536.13,1006.53 r270 top
C104 "150pF" 0402C-GENERIC 1544.13,696.53 r180 bottom
C105 "100nF" 0402C-GENERIC 1543.13,738.53 r180 bottom
C106 "150pF" 0402C-GENERIC 1543.13,759.53 r180 top
C107 "100nF" 0402C-GENERIC 1544.13,716.53 r180 top
C108 "150pF/10V" 0402C-GENERIC 1980.13,483.53 r180 top
C110 "100nF" 0402C-GENERIC 2070.13,543.53 r180 top
C111 "1uF/6.3V" 0402C-GENERIC 1980.13,572.53 r180 top
C112 "100nF" 0402C-GENERIC 2212.13,526.53 r0 bottom
C113 "150pF/10V" 0402C-GENERIC 2116.18,514.58 r0 bottom
C114 "10n/16V" 0402C-GENERIC 2161.13,912.53 r270 top
C115 "150pF/10V" 0402C-GENERIC 1980.13,527.53 r180 top
C116 "100nF" 0402C-GENERIC 1980.13,618.53 r180 top
C117 "1uF/6.3V" 0402C-GENERIC 2031.13,500.53 r0 top
C118 "10n/16V" 0402C-GENERIC 2247.13,872.53 r90 top
C119 "10n/16V" 0402C-GENERIC 2066.93,909.45 r270 top
C120 "10n/16V" 0402C-GENERIC 1962.13,1008.53 r270 top
C121 "150pF" 0402C-GENERIC 1981.13,666.53 r180 top
C122 "150pF" 0402C-GENERIC 1980.13,711.53 r180 top
C123 "100nF" 0402C-GENERIC 1980.13,711.53 r180 bottom
C124 "100nF" 0402C-GENERIC 1980.13,757.53 r180 top
C125 "Comment" 0402C-GENERIC 409.45,1098.43 r270 bottom
D2 "2V/20mA" LED-SM 3136.13,452.53 r90 top
D4 "" SMB/DO214AA 2000.06,153.2 r180 top
D5 "1N4148" SOD-123 3323.13,310.53 r90 top
D6 "" SOD323 3244.16,452.41 r270 top
D7 "2V/20mA" LED-SM 3398.18,123.53 r180 top
D8 "2V/20mA" LED-SM 2303.21,1751.62 r0 top
D9 "2V/20mA" LED-SM 2303.21,1818.55 r0 top
D14 "LED2" LED-SM 2641.18,1387.53 r180 top
D15 "LED2" LED-SM 2640.18,1457.53 r180 top
D16 "" SMB/DO214AA 3366.2,208.32 r90 bottom
J1 "RJ45-GENERIC" RJ45-8/8 1735.13,2115.53 r0 top
J2 "Header1x1" HDR1X2 3200.79,1027.56 r0 top
J3 "Header1x1" HDR1X2 3196.85,889.76 r0 top
J4 "Header1x1" HDR1X2 3201.13,1467.53 r0 top
J5 "Header1x1" HDR1X2 3202.13,1321.53 r0 top
J6 "Header1x1" HDR1X2 3202.13,1177.53 r0 top
J7 "Header1x1" HDR1X2 3302.13,764.53 r180 top
L2 "4.7uH/2.6A" "Murata 15uH inductor" 3880.87,484.53 r180 top
L3 "FB1/120 Ohms" 0603C-2U2 2780.13,2157.53 r180 bottom
L4 "FeILB" 0603C-TBD 304.13,1417.53 r270 top
L5 "FeILB" 0603C-TBD 197.13,1417.53 r270 top
L6 "FeILB" 0603C-TBD 254.13,1417.53 r270 top
L7 "FeILB" 0603C-TBD 355.13,1417.53 r270 top
L8 "FeILB" 0603C-TBD 459.13,1362.53 r90 top
L9 "FeILB" 0603C-TBD 198.13,1261.53 r270 top
L10 "FeILB" 0603C-TBD 751.13,1416.53 r270 top
L11 "FeILB" 0603C-TBD 644.13,1416.53 r270 top
L12 "FeILB" 0603C-TBD 698.13,1416.53 r270 top
L13 "FeILB" 0603C-TBD 806.13,1416.53 r270 top
L14 "FeILB" 0603C-TBD 906.13,1418.53 r270 top
L15 "FeILB" 0603C-TBD 646.13,1260.53 r270 top
L16 "FeILB" 0603C-TBD 1185.13,1412.53 r270 top
L17 "FeILB" 0603C-TBD 1071.13,1413.53 r270 top
L18 "FeILB" 0603C-TBD 1127.13,1413.53 r270 top
L19 "FeILB" 0603C-TBD 1242.03,1413.53 r270 top
L20 "FeILB" 0603C-TBD 1341.13,1414.53 r270 top
L21 "FeILB" 0603C-TBD 1068.13,1202.53 r90 top
L22 "FeILB" 0603C-TBD 1622.13,1413.53 r270 top
L23 "FeILB" 0603C-TBD 1507.13,1413.53 r270 top
L24 "FeILB" 0603C-TBD 1564.13,1413.53 r270 top
L25 "FeILB" 0603C-TBD 1678.13,1358.53 r90 top
L26 "FeILB" 0603C-TBD 1812.13,1415.53 r270 top
L27 "FeILB" 0603C-TBD 1508.13,1253.53 r270 top
L28 "FeILB" 0603C-TBD 1943.13,1415.53 r270 top
L29 "FeILB" 0603C-TBD 2176.13,1413.53 r270 top
L30 "FeILB" 0603C-TBD 1885.13,1261.53 r270 top
L31 "FeILB" 0603C-TBD 2005.13,1413.53 r270 top
L32 "FeILB" 0603C-TBD 2064.13,1413.53 r270 top
L33 "FeILB" 0603C-TBD 1877.13,1415.53 r270 top
M2 "Comment" ESP8266WROOm-02 3377.95,1472.44 r270 top
P1 "Header 5" HDR1X5 2336.13,1268.53 r270 top
P2 "Header 24" HDR1X24 913.13,296.53 r0 top
P3 "Header 13" HDR1X13 1526.13,1571.53 r0 top
P4 "Header 5" HDR1X5 3098.43,1070.87 r90 top
P5 "Header 5X2" "Header2x5 1.27mm pitch" 1539.37,1753.15 r0 top
P6 "Header 2" HDR1X2 2708.13,421.53 r0 top
P7 "Header 2" HDR1X2 1569.13,156.53 r0 top (schematic designator P5)
Q1 "MMBT3906" SOT23-BCE 3268.13,588.53 r90 bottom (schematic designator Q4)
Q2 "Comment" MMBT2222 3030.93,592.53 r180 bottom
R3 "100K" 0402R-TBD 3485.13,110.53 r90 top
R4 "47R" 0402R-TBD 3230.13,373.53 r180 bottom
R7 "27K" 0402R-TBD 3527.13,150.53 r270 top
R9 "1K" 0402R-TBD 3089.13,581.53 r0 bottom
R10 "10R" 0402R-TBD 3312.13,644.53 r90 bottom
R11 "10R" 0402R-TBD 3307.13,487.53 r90 bottom
R12 "57.6K" 0402R-TBD 3364.13,599.53 r270 top
R13 "10K" 0402R-TBD 3023.13,1171.53 r180 bottom
R14 "0/125W" 0402C-GENERIC 3413.13,376.53 r90 top
R15 "27K" 0402R-TBD 2957.13,477.53 r0 top
R16 "Comment" 0402C-GENERIC 3072.13,513.53 r180 bottom
R17 "10K" 0402R-TBD 3491.13,472.53 r180 top
R18 "75K/1%/.125W" 0402C-TBD 3473.13,599.53 r270 top
R19 "40.2K/1%/.125W" 0402R-TBD 3409.13,559.53 r90 top
R20 "47" 0402R-TBD 3357.13,178.53 r0 top
R21 "13K" 0402R-TBD 3531.13,559.53 r90 top
R22 "1.5K" 0402R-TBD 2569.13,1731.53 r180 top
R23 "49.9" 0402R-TBD 2815.02,2436.66 r270 bottom
R24 "49.9" 0402R-TBD 2866.2,2535.09 r270 bottom
R25 "49.9" 0402R-TBD 2815.02,2306.11 r90 bottom
R26 "49.9" 0402R-TBD 2858.33,2259.5 r270 bottom
R27 "75/1%/.125W" 0402R-TBD 1833.13,2324.53 r270 top
R28 "75/1%/.125W" 0402R-TBD 1834.13,2225.53 r270 top
R29 "100" 0402R-TBD 2570.13,1914.53 r180 top
R30 "100" 0402R-TBD 2571.13,1958.53 r180 top
R31 "100" 0402R-TBD 2570.13,1774.53 r180 top
R32 "100" 0402R-TBD 2570.13,1817.53 r180 top
R33 "75/1%/.125W" 0402R-TBD 1837.13,2417.53 r90 top
R34 "75/1%/.125W" 0402R-TBD 1834.13,2091.53 r90 top
R35 "" 0402C-GENERIC 2721.13,1722.53 r180 top
R36 "4.7k" 0402R-TBD 2571.13,1867.53 r180 top
R37 "12.1k" 0402R-TBD 2838.65,2097.45 r90 top
R38 "47" 0402R-TBD 2416.13,1770.53 r0 top
R39 "47" 0402R-TBD 2419.13,1821.53 r0 top
R40 "220R" 0402R-TBD 333.13,1313.53 r180 top
R41 "18.7" 0402R-TBD 196.13,1312.53 r0 top
R42 "220R" 0402R-TBD 441.13,873.67 r90 top
R45 "470/1%/.250W" 1206FB-GENERIC 516.13,1132.53 r270 top
R46 "1M" 0402R-TBD 3217.17,940.94 r180 bottom
R47 "220R" 0402R-TBD 392.13,1269.53 r90 top
R49 "18.7" 0402R-TBD 401.13,1404.53 r270 top
R50 "220R" 0402R-TBD 391.13,873.67 r90 top
R53 "470/1%/.250W" 1206FB-GENERIC 271.13,997.53 r90 top
R55 "220R" 0402R-TBD 777.13,1307.53 r180 top
R57 "18.7" 0402R-TBD 644.13,1307.53 r0 top
R58 "220R" 0402R-TBD 901.13,873.53 r90 top
R59 "10k" 0402R-TBD 2496.06,629.92 r0 bottom
R61 "470/1%/.250W" 1206FB-GENERIC 970.13,1131.53 r270 top
R63 "220R" 0402R-TBD 798.13,873.53 r90 top
R64 "18.7" 0402R-TBD 855.13,1360.53 r90 top
R66 "220R" 0402R-TBD 858.13,1263.53 r90 top
R67 "220R" 0402R-TBD 2734.13,1455.53 r180 top
R68 "220R" 0402R-TBD 2740.13,1390.53 r180 top
R72 "470/1%/.250W" 1206FB-GENERIC 725.13,998.53 r90 top
R74 "220R" 0402R-TBD 1380.13,873.53 r90 top
R75 "18.7" 0402R-TBD 1168.13,1308.53 r0 top
R77 "220R" 0402R-TBD 1066.13,1307.53 r0 top
R78 "470/1%/.250W" 1206FB-GENERIC 1408.13,1132.53 r270 top
R80 "220R" 0402R-TBD 1238.13,873.53 r90 top
R82 "18.7" 0402R-TBD 1289.13,1357.53 r90 top
R83 "220R" 0402R-TBD 1289.13,1261.53 r90 top
R85 "470/1%/.250W" 1206FB-GENERIC 1170.13,996.53 r90 top
R87 "220R" 0402R-TBD 1659.13,1308.53 r180 top
R88 "18.7" 0402R-TBD 1505.13,1307.53 r0 top
R89 "220R" 0402R-TBD 1779.13,873.53 r90 top
R90 "470/1%/.250W" 1206FB-GENERIC 1854.13,997.53 r90 top
R92 "220R" 0402R-TBD 1722.13,1263.53 r90 top
R94 "18.7" 0402R-TBD 1766.13,1363.53 r90 top
R95 "220R" 0402R-TBD 1729.13,873.53 r90 top
R96 "470/1%/.250W" 1206FB-GENERIC 1612.13,995.53 r90 top
R101 "220R" 0402R-TBD 2203.13,872.53 r90 top
R103 "18.7" 0402R-TBD 2117.13,1290.53 r270 top
R104 "220R" 0402R-TBD 2118.13,1357.53 r90 top
R106 "470/1%/.250W" 1206FB-GENERIC 2233.13,988.53 r90 top
R109 "220R" 0402R-TBD 1882.13,1305.53 r0 top
R110 "18.7" 0402R-TBD 2015.13,1305.53 r180 top
R111 "220R" 0402R-TBD 2017.61,871.53 r90 top
R112 "470/1%/.250W" 1206FB-GENERIC 2040.13,997.53 r90 top
R113 "10K/" 0402C-GENERIC 300.13,388.53 r90 bottom
R114 "10K" 0402C-GENERIC 654.13,373.53 r90 bottom
R115 "10K" 0402C-GENERIC 1172.13,411.53 r90 bottom
R116 "10K" 0402C-GENERIC 1594.13,412.53 r90 bottom
R117 "10K" 0402C-GENERIC 2051.13,405.53 r90 bottom
R120 "" 0402C-TBD 2838.65,2011.46 r90 top
R121 "10K" 0402R-TBD 2733.13,489.53 r180 top
S1 "" PushButton-SMD 2374.02,393.7 r0 bottom
TP2 "TESTPOINT" TESTPOINT 2365.13,1881.53 r0 top (schematic designator TP3)
TP3 "TESTPOINT" TESTPOINT 2437.13,1963.53 r0 top (schematic designator TP4)
TP11 "TESTPOINT" TESTPOINT 3088.13,830.53 r90 top (schematic designator TP5)
TP12 "TESTPOINT" TESTPOINT 3094.13,715.53 r90 top (schematic designator TP6)
TP13 "TESTPOINT" TESTPOINT 669.29,818.9 r90 top (schematic designator TP19)
TP18 "TESTPOINT" TESTPOINT 1519.13,876.53 r90 top (schematic designator TP26)
TP19 "TESTPOINT" TESTPOINT 1422.13,1223.53 r90 top (schematic designator TP27)
TP20 "TESTPOINT" TESTPOINT 1424.13,1303.53 r90 top (schematic designator TP28)
TP21 "TESTPOINT" TESTPOINT 1163.13,1227.53 r90 top (schematic designator TP29)
TP21 "TESTPOINT" TESTPOINT 1815.13,1218.53 r90 top (schematic designator TP30)
TP22 "TESTPOINT" TESTPOINT 1814.96,1291.34 r180 top (schematic designator TP31)
TP23 "TESTPOINT" TESTPOINT 1614.13,1235.53 r90 top (schematic designator TP32)
TP24 "TESTPOINT" TESTPOINT 1587.13,877.53 r90 top (schematic designator TP33)
TP25 "TESTPOINT" TESTPOINT 2334.13,744.53 r90 top (schematic designator TP34)
TrET1 "HX1224NL" HX1224-NL 2574.87,2107.37 r90 top
TS1 "Comment" NZ17SZ125 1192.91,106.3 r0 top
U2 "MP1470" MP1470 3474.32,314.16 r0 top
U3 "LAN8720" QFN24_4X4_N 2734.97,1863.79 r270 top
U4 "STPM34" 32M1-A_L#1 432.13,678.53 r180 top
U5 "PIC32MX795" TQFP-PT64_N 2677.62,990.17 r0 bottom
U6 "STPM34" 32M1-A_L#2 867.97,675.07 r180 top
U7 "W25Q16DVZP" SO8_M 2691.13,969.53 r0 top
U8 "STPM34" 32M1-A_L#1 1305.13,675.53 r180 top
U9 "STPM34" 32M1-A_L#1 1735.97,676.07 r180 top
U10 "STPM34" 32M1-A_L#2 2166.02,676.07 r180 top
U11 "NUD312D" NUD3112D 2313.72,106.04 r90 top
U12 "NUD312D" NUD3112D 2513.32,106.53 r90 top
U13 "NUD312D" NUD3112D 2713.72,106.04 r90 top
U14 "NUD312D" NUD3112D 2912.72,105.53 r90 top
U15 "NUD312D" NUD3112D 3111.72,107.04 r90 top
U16 "NL17SZ125" NZ17SZ125 365.32,434.02 r0 bottom
U17 "NL17SZ125" NZ17SZ125 730.72,434.53 r0 bottom
U18 "NL17SZ125" NZ17SZ125 1234.72,452.53 r0 bottom
U19 "NL17SZ125" NZ17SZ125 1660.72,454.53 r0 bottom
U20 "NL17SZ125" NZ17SZ125 2107.13,459.02 r0 bottom
U21 "NUD3112D" NUD3112D 1395.72,107.53 r90 top
Y1 "Comment" CeramicResonator8-16MHZ 2574.87,2035.09 r0 bottom
Y2 "" CeramicResonator8-16MHZ 489.13,1032.53 r90 bottom
Y3 "8MHz" CeramicResonator8-16MHZ 3102.36,937.01 r180 bottom

## Footprints (in the part's own frame and the unit in brackets; to place one, negate y for a bottom-side part, rotate by r counter-clockwise, add the part's x,y. Pads: shape width x height; smd on the part's side, far side on the other; paste and mask are expansions set on the pad)
32M1-A_L#1 [mm] "32-Pin Quad Flat No-Lead 0.5 mm Pitch, IPC High Density"
  oval 0.7x0.25 smd: 1(-2.45,1.75) 2(-2.45,1.25) 3(-2.45,0.75) 4(-2.45,0.25) 5(-2.45,-0.25) 6(-2.45,-0.75) 7(-2.45,-1.25) 8(-2.45,-1.75) 17(2.45,-1.75) 18(2.45,-1.25) 19(2.45,-0.75) 20(2.45,-0.25) 21(2.45,0.25) 22(2.45,0.75) 23(2.45,1.25) 24(2.45,1.75)
  oval 0.25x0.7 smd: 9(-1.75,-2.45) 10(-1.25,-2.45) 11(-0.75,-2.45) 12(-0.25,-2.45) 13(0.25,-2.45) 14(0.75,-2.45) 15(1.25,-2.45) 16(1.75,-2.45) 25(1.75,2.45) 26(1.25,2.45) 27(0.75,2.45) 28(0.25,2.45) 29(-0.25,2.45) 30(-0.75,2.45) 31(-1.25,2.45) 32(-1.75,2.45)
  rect 3.3x3.3 smd: 33(0,0)
  silkscreen extent -3.48,-2.6 2.6,2.6, body extent -2.58,-2.58 2.58,2.58, height 1
32M1-A_L#2 [mm] "32-Pin Quad Flat No-Lead 0.5 mm Pitch, IPC High Density"
  oval 0.7x0.25 smd: 1(-2.45,1.75) 2(-2.45,1.25) 3(-2.45,0.75) 4(-2.45,0.25) 5(-2.45,-0.25) 6(-2.45,-0.75) 7(-2.45,-1.25) 8(-2.45,-1.75) 17(2.45,-1.75) 18(2.45,-1.25) 19(2.45,-0.75) 20(2.45,-0.25) 21(2.45,0.25) 22(2.45,0.75) 23(2.45,1.25) 24(2.45,1.75)
  oval 0.25x0.7 smd: 9(-1.75,-2.45) 10(-1.25,-2.45) 11(-0.75,-2.45) 12(-0.25,-2.45) 13(0.25,-2.45) 14(0.75,-2.45) 15(1.25,-2.45) 16(1.75,-2.45) 25(1.75,2.45) 26(1.25,2.45) 27(0.75,2.45) 28(0.25,2.45) 29(-0.25,2.45) 30(-0.75,2.45) 31(-1.25,2.45) 32(-1.75,2.45)
  rect 3.45x3.45 smd: 33(0,0)
  silkscreen extent -3.48,-2.6 2.6,2.6, body extent -2.58,-2.58 2.58,2.58, height 1
0402C-GENERIC [mil]
  rect 25x20 smd: 1(0,0) 2(40,0)
  silkscreen extent -21,-19 61,19
0402C-TBD [mil]
  rect 25x20 smd: 1(0,0) 2(40,0)
  silkscreen extent -21,-19 61,19, body extent 2,-9 39,9, height 19
0402R-TBD [mil]
  rect 25x20 smd: 1(0,0) 2(40,0)
  silkscreen extent -21,-19 61,19, body extent -6,-10 46,10, height 14
470uF/6.3v [mil]
  rect 60x60 hole 30: 1(0,0)
  round 60 hole 30: 2(137.8,0)
  silkscreen extent -87,-157 228,157
0603C-2U2 [mil] "CAPACITOR 0603"
  rect 30x30 smd: 1(0,0) 2(55,0)
  silkscreen extent -23,-23 78,23, body extent -4,-15 59,15, height 19
0603C-TBD [mil] "CAPACITOR 0603 TBD"
  rect 30x30 smd: 1(0,0) 2(55,0)
  silkscreen extent -23,-23 78,23, body extent -4,-15 59,15, height 19
1206C-GENERIC [mil]
  rect 60x60 smd: 1(0,0) 2(135,0)
  silkscreen extent -50,-50 185,50, body extent -8,-29 147,29, height 46
1206FB-GENERIC [mm] "FERRITE BEAD 1206"
  rect 1.25x1.7 smd: 1(0,0) 2(3.429,0)
  silkscreen extent -1.27,-1.27 4.7,1.27, body extent 0.11,-0.81 3.31,0.8, height 1.55
BAT-2 [mm] "Battery; 2 Leads"
  rect 1.5x1.5 hole 0.9: 1(-1.27,0)
  round 1.5 hole 0.9: 2(1.27,0)
  silkscreen extent -2.54,-1.27 2.54,1.27
CeramicResonator8-16MHZ [mm]
  rect 1.4x1.2 smd: 1(0,0) 2(2.2,0) 3(2.2,1.7) 4(0,1.7)
  silkscreen extent -1.1,-1.1 3.4,2.7
ESP8266WROOm-02 [mm]
  rect 2.5x0.92 smd: 1(0,12.9) 2(0,11.4) 3(0,9.9) 4(0,8.4) 5(0,6.9) 6(0,5.4) 7(0,3.9) 8(0,2.4) 9(0,0.9) 10(18.3,0.9) 11(18.3,2.4) 12(18.3,3.9) 13(18.3,5.4) 14(18.3,6.9) 15(18.3,8.4) 16(18.3,9.9) 17(18.3,11.4) 18(18.3,12.9)
  silkscreen extent -2.2,0 20.5,20.25
HDR1X2 [mm] "Connector; Header; 2 Position"
  rect 1.5x1.5 hole 0.9: 1(0,0)
  round 1.5 hole 0.9: 2(2.54,0)
  silkscreen extent -1.27,-1.27 3.81,1.27
HDR1X5 [mm] "Connector; Header; 5 Position"
  rect 1.5x1.5 hole 0.9: 1(0,0)
  round 1.5 hole 0.9: 2(2.54,0) 3(5.08,0) 4(7.62,0) 5(10.16,0)
  silkscreen extent -1.27,-1.27 11.43,1.27
HDR1X13 [mm] "Connector; Header; 13 Position"
  rect 1.5x1.5 hole 0.9: 1(0,0)
  round 1.5 hole 0.9: 2(2.54,0) 3(5.08,0) 4(7.62,0) 5(10.16,0) 6(12.7,0) 7(15.24,0) 8(17.78,0) 9(20.32,0) 10(22.86,0) 11(25.4,0) 12(27.94,0) 13(30.48,0)
  silkscreen extent -1.27,-1.27 31.75,1.27
HDR1X24 [mm] "Connector; Header; 24 Position"
  rect 1.5x1.5 hole 0.9: 1(0,0)
  round 1.5 hole 0.9: 2(2.54,0) 3(5.08,0) 4(7.62,0) 5(10.16,0) 6(12.7,0) 7(15.24,0) 8(17.78,0) 9(20.32,0) 10(22.86,0) 11(25.4,0) 12(27.94,0) 13(30.48,0) 14(33.02,0) 15(35.56,0) 16(38.1,0) 17(40.64,0) 18(43.18,0) 19(45.72,0) 20(48.26,0) 21(50.8,0) 22(53.34,0) 23(55.88,0) 24(58.42,0)
  silkscreen extent -1.27,-1.27 59.69,1.27
"Header2x5 1.27mm pitch" [mm]
  round 0.9 hole 0.5: 1(0,0) 2(0,1.27) 3(1.27,0) 4(1.27,1.27) 5(2.54,0) 6(2.54,1.27) 7(3.81,0) 8(3.81,1.27) 9(5.08,0) 10(5.08,1.27)
  silkscreen extent -1.4,-1.4 6.4,2.9
"HiVoltCapacitor 470pF/6kV" [mil]
  round 71 hole 47: 1(0,0) 2(250,3.94)
  silkscreen extent -51,-55 303,63
HX1224-NL [mil] "Pulse trans"
  rect 40x75 smd: 1(0,0) 2(80,0) 3(160,0) 4(280,0) 5(360,0) 6(440,0) 7(440,545) 8(360,545) 9(280,545) 10(160,545) 11(80,545) 12(0,545)
  silkscreen extent -55,-71 488,602
LED-SM [mm]
  rect 0.8x0.8 smd: 1(0,0) 2(1.5,0)
  silkscreen extent -0.9,-0.7 2.5,0.8
MMBT2222 [mm]
  rect 0.8x0.9 smd: B(0,0) C(0.95,2) E(1.9,0)
  silkscreen extent -0.8,-0.75 2.7,2.7
MP1470 [mm] "Power  Supply IC"
  rect 0.6x1.2 smd: 1(0,0) 2(0.95,0) 3(1.95,0) 4(1.9,2.6) 5(0.95,2.6) 6(0,2.6)
  silkscreen extent -1,0.4 -0.6,2.1
"Murata 15uH inductor" [mm]
  rect 1.75x3 smd: 1(0,0.025) 2(6.75,0)
  silkscreen extent -0.7,-4.1 7.4,3.9
NUD3112D [mm]
  rect 1x0.7 smd: 1(0,0) 1(0,0) 2(0,-0.95) 3(0,-1.9) 4(2.4,-1.9) 5(2.4,-0.95) 6(2.4,0)
  silkscreen extent -0.3,-2.6 2.4,0.8
NZ17SZ125 [mm] "Buffer"
  rect 0.7x1 smd: 1(0,0) 2(0.95,0) 3(1.9,0) 4(1.9,2.4) 5(0,2.4)
  silkscreen extent -0.9,-0.1 2.9,2.5
PushButton-SMD [mm]
  rect 1.8x1.1 smd: 1(0,0) 3(0,-3.6) 4(6.2,-3.6)
  rect 1.8x1.1 smd mask+0.102: 2(6.2,0)
  silkscreen extent 1.91,-3.02 4.39,-0.53
QFN24_4X4_N [mm] "QFN, 24-Leads, Body 4x4mm, Pitch 0.5mm, IPC Medium Density"
  oval 0.8x0.25 smd: 1(-2,1.25) 2(-2.151,0.733) 3(-2,0.25) 4(-2,-0.25) 5(-2,-0.75) 6(-2,-1.25) 13(2,-1.25) 14(2,-0.75) 15(2,-0.25) 16(2,0.25) 17(2,0.75) 18(2,1.25)
  oval 0.25x0.8 smd: 7(-1.25,-2) 8(-0.75,-2) 9(-0.25,-2) 10(0.25,-2) 11(0.75,-2) 12(1.25,-2) 19(1.25,2) 20(0.75,2) 21(0.25,2) 22(-0.25,2) 23(-0.75,2) 24(-1.25,2)
  rect 2.3x2.3 smd: 25(0,0)
  silkscreen extent -3,-2.22 2.22,2.22, body extent -2.07,-2.07 2.07,2.07, height 1
RJ45-8/8 [mil]
  round 70 hole 40: 1(-100,350) 2(1,300) 3(-99,250) 4(0,200) 5(-99,150) 6(1,100) 7(-99,50) 8(0,0)
  round 110 hole 110 unplated: A(-340,-55) B(-340,405)
  silkscreen extent -650,-125 75,475
SMB/DO214AA [mm]
  rect 2.5x2.2 smd: A(0,0) K(4.7,0)
  silkscreen extent -1.8,-2 6.5,2
SO8_M [mm] "SOIC, 8-Leads, Body 4.9x3.9mm, Pitch 1.27mm, IPC Low Density"
  oval 2.5x0.7 smd: 1(-2.45,1.905) 2(-2.45,0.635) 3(-2.45,-0.635) 4(-2.45,-1.905) 5(2.45,-1.905) 6(2.45,-0.635) 7(2.45,0.635) 8(2.45,1.905)
  silkscreen extent -2.57,-2.5 0.8,2.93, body extent -2,-2.5 2,2.5, height 1.75
SOD323 [mm]
  rect 1x1 smd far side: A(0,0) K(-2,0)
  body extent -2.23,-0.65 0.18,0.65, height 0.74
SOD-123 [mm]
  rect 0.9x1.2 smd: A(3.048,0) K(0,0)
  silkscreen extent -0.64,-1.02 3.68,1.02, body extent -0.18,-0.87 3.3,0.87, height 0.79
SOT23-BCE [mil]
  rect 36x36 smd: B(0,0) E(0,-75)
  rect 50x36 smd: C(80,-38)
  silkscreen extent -25,-100 110,25, body extent -3,-95 94,20, height 41
TESTPOINT [mil]
  round 60 hole 30: 1(0,0)
  silkscreen extent -50,-50 70,50, body extent -54,-52 54,52, height 254
TQFP-PT64_N [mm] "Thin QFP, 64-Leads, Body 10x10mm, Pitch 0.5mm, IPC Medium Density"
  oval 1.8x0.3 smd: 1(-5.55,3.75) 2(-5.55,3.25) 3(-5.55,2.75) 4(-5.55,2.25) 5(-5.55,1.75) 6(-5.55,1.25) 7(-5.55,0.75) 8(-5.55,0.25) 9(-5.55,-0.25) 10(-5.55,-0.75) 11(-5.55,-1.25) 12(-5.55,-1.75) 13(-5.55,-2.25) 14(-5.55,-2.75) 15(-5.55,-3.25) 16(-5.55,-3.75) 33(5.55,-3.75) 34(5.55,-3.25) 35(5.55,-2.75) 36(5.55,-2.25) 37(5.55,-1.75) 38(5.55,-1.25) 39(5.55,-0.75) 40(5.55,-0.25) 41(5.55,0.25) 42(5.55,0.75) 43(5.55,1.25) 44(5.55,1.75) 45(5.55,2.25) 46(5.55,2.75) 47(5.55,3.25) 48(5.55,3.75)
  oval 0.3x1.8 smd: 17(-3.75,-5.55) 18(-3.25,-5.55) 19(-2.75,-5.55) 20(-2.25,-5.55) 21(-1.75,-5.55) 22(-1.25,-5.55) 23(-0.75,-5.55) 24(-0.25,-5.55) 25(0.25,-5.55) 26(0.75,-5.55) 27(1.25,-5.55) 28(1.75,-5.55) 29(2.25,-5.55) 30(2.75,-5.55) 31(3.25,-5.55) 32(3.75,-5.55) 49(3.75,5.55) 50(3.25,5.55) 51(2.75,5.55) 52(2.25,5.55) 53(1.75,5.55) 54(1.25,5.55) 55(0.75,5.55) 56(0.25,5.55) 57(-0.25,5.55) 58(-0.75,5.55) 59(-1.25,5.55) 60(-1.75,5.55) 61(-2.25,5.55) 62(-2.75,5.55) 63(-3.25,5.55) 64(-3.75,5.55)
  silkscreen extent -5.67,4.33 -5.42,4.57, body extent -5,-5 5,5, height 1.2

## Part data
BT1: library part Battery, "Multicell Battery"
C7 C8 C9 C10 C11 C12 C13 C14 C15 C16 C28 C37 C39 C40 C41 C44 C45 C59 C64 C81 C93 C99 C111 C117: library part Cap, "Capacitor"
C17 C18 C19 C20 C21 C23 C25 C26 C27 C29 C30 C32 C33 C35 C36 C42 C43 C47 C48 C50 C51 C52 C53 C54 C56 C57 C60 C61 C62 C63 C65 C66 C67 C68 C69 C70 C71 C72 C73 C74 C75 C77 C79 C80 C82 C83 C84 C85 C86 C87 C88 C89 C90 C91 C94 C95 C96 C97 C98 C100 C101 C102 C103 C104 C105 C106 C107 C108 C110 C112 C113 C114 C115 C116 C118 C119 C120 C121 C122 C123 C124: library part 0805C-18PF-50V-C0G-JOH, "CAPACITOR 0805 CERAMIC"
C31: "Polarized Capacitor (Surface Mount)"
D2 D7 D8 D9: library part LED2, "Typical RED, GREEN, YELLOW, AMBER GaAs LED"
D5: library part 1N4001, "1N4001"
D14 D15: "Typical RED, GREEN, YELLOW, AMBER GaAs LED"
J1: "GENERIC RJ45 CONNECTOR 8 PIN"
L2: library part Inductor, "Inductor"
L3: library part 1U-1239AS-TOKO, "1239AS-H-1R0N"
L4 L5 L6 L7 L8 L9 L10 L11 L12 L13 L14 L15 L16 L17 L18 L19 L20 L21 L22 L23 L24 L25 L26 L27 L28 L29 L30 L31 L32 L33: library part FerrBeads/ILBB
P1 P4: "Header, 5-Pin"
P2: "Header, 24-Pin"
P3: "Header, 13-Pin"
P5: "Header, 5-Pin, Dual row"
P6 P7: "Header, 2-Pin"
Q1: library part PNP-GENERIC, "GENERIC PNP BIPOLAR TRANSISTOR"
R3 R4 R7 R9 R10 R11 R12 R13 R14 R15 R17 R18 R19 R20 R21 R22 R23 R24 R25 R26 R27 R28 R29 R30 R31 R32 R33 R34 R36 R37 R38 R39 R40 R41 R42 R45 R46 R47 R49 R50 R53 R55 R57 R58 R59 R61 R63 R64 R66 R67 R68 R72 R74 R75 R77 R78 R80 R82 R83 R85 R87 R88 R89 R90 R92 R94 R95 R96 R101 R103 R104 R106 R109 R110 R111 R112 R113 R114 R115 R116 R117 R121: library part Res3, "Resistor"
TP2 TP3 TP11 TP12 TP13 TP18 TP19 TP20 TP21 TP21 TP22 TP23 TP24 TP25: "TESTPOINT SCOPE GRABBER"
TrET1: library part hx1224nl
U5: library part PIC32MX534F064F
U7: library part 23LCV1024
U16 U17 U18 U19 U20: "Tristate Single Buffer"
U21: library part NUD312D
Y3: library part 12MC-HC49US-7MM, "12MHz CRYSTAL HC49US SHORT BODY"

## Free pads (board coordinates)
  round 90 hole 60: 0(1987.13,1871.53) 0(2096.13,1871.53)
  round 35 hole 20: 0(3476.38,366.14) 0(3527.56,366.14)
  rect 70.87x39.37 smd far side: 1(114.17,685.04) 1(145.67,1232.28) 1(145.67,401.57) 1(145.67,547.24) 1(145.67,858.27) 1(145.67,948.82) 1(145.67,1122.05) 1(149.61,141.73) 1(149.61,767.72) 1(500,125.98) 1(566.93,326.77) 1(622.05,125.98) 1(744.09,122.05) 1(870.08,122.05) 1(1031.5,444.88) 1(1507.87,492.13) 1(2279.53,2133.86) 1(2346.46,594.49) 1(2405.51,2133.86) 1(2846.46,1492.13) 1(2846.46,1555.12) 1(2846.46,1618.11) T14(141.73,1429.13)
  round 60 hole 30: 1(3779.53,570.87) 2(3708.66,570.87) 3(3708.66,500) 4(3779.53,500) 7(3783.46,425.2) 9(3708.66,425.2)
  round 32 hole 20: 6(432.13,678.53) 7(867.97,675.07) 8(1305.13,675.53) 9(1735.97,676.07) 10(2166.02,676.07)

## Via types
v1: diameter 22, hole 12, L1 to L4, 370 vias
v2: diameter 22, hole 20, L1 to L4, 19 vias
v3: diameter 32, hole 20, L1 to L4, tented top, 19 vias
v4: diameter 20, hole 10, L1 to L4, 4 vias
v5: diameter 22, hole 12, L1 to L4, tented top, 4 vias
v6: diameter 32, hole 20, L1 to L4, 4 vias
v7: diameter 32, hole 18, L1 to L4, tented top, 1 vias

## Nets (pads, with @x,y where several pads share a name; then routed paths per layer and width w, separated by ;. In a path a pad name is that pad's centre, name@x,y a point inside that pad or via, vN(x,y) a via of type N, cw(c..) or ccw(c..) an arc to the next point about the centre after c; other vN are vias at no path point)
GND: BT1.2 C8.2 C9.2 C10.2 C11.2 C12.2 C13.2 C14.2 C15.2 C16.1 C17.2 C18.2 C19.2 C20.2 C21.2 C22.2 C23.2 C24.2 C25.2 C26.2 C27.2 C28.2 C29.2 C30.2 C31.2 C32.2 C33.2 C34.1 C36.2 C37.1 C38.2 C39.2 C40.1 C41.1 C42.2 C44.1 C45.1 C46.2 C47.2 C50.2 C51.2 C52.1 C53.2 C56.2 C57.2 C59.2 C60.2 C61.2 C62.2 C63.2 C64.2 C67.2 C69.2 C70.2 C71.2 C72.2 C74.2 C75.2 C77.2 C78.2 C79.2 C80.2 C81.2 C82.2 C86.2 C87.2 C88.2 C89.2 C91.2 C93.2 C95.2 C96.2 C97.2 C98.1 C99.2 C100.2 C104.2 C105.2 C106.2 C107.2 C108.2 C110.1 C111.2 C112.2 C113.2 C115.2 C116.2 C117.2 C121.2 C122.2 C123.2 C124.2 C125.1 D6.A D7.2 D14.2 D15.2 J7.1 L5.1 L6.1 L8.1 L9.1 L11.1 L12.1 L14.1 L15.1 L17.1 L18.1 L20.1 L21.1 L23.1 L24.1 L26.1 L27.1 L29.1 L30.1 L32.1 L33.1 M2.6 M2.7 M2.9 M2.13 P1.5 P2.11 P2.12 P2.13 P3.11 P3.12 P3.13 P4.4 P4.5 P5.1 P6.2 P7.2 pad.0@1987.13,1871.53 pad.0@2096.13,1871.53 pad.6 pad.7@867.97,675.07 pad.8 pad.9@1735.97,676.07 pad.10 Q2.E R7.1 R15.1 R16.1 R21.1 R37.1 R38.2 R39.2 R120.2 S1.2 TS1.5 U2.1 U3.25 U4.3 U4.18 U4.20 U4.22 U4.25 U4.26 U4.33 U5.9 U5.20 U5.25 U5.41 U6.3 U6.18 U6.20 U6.22 U6.25 U6.26 U6.33 U7.3 U7.4 U8.3 U8.18 U8.20 U8.22 U8.25 U8.26 U8.33 U9.3 U9.18 U9.20 U9.22 U9.25 U9.26 U9.33 U10.3 U10.18 U10.20 U10.22 U10.25 U10.26 U10.33 U11.1 U11.4 U12.1 U12.4 U13.1 U13.4 U14.1 U14.4 U15.1 U15.4 U16.3 U17.3 U18.3 U19.3 U20.3 U21.1 U21.5 Y1.2 Y1.4 Y2.2 Y3.2 Y3.4 | length 13700.7
  L1 w10: v1(205.13,578.53) 207.13,580.53 207.13,597.53 246.13,597.53 C52.1@246.13,625.53 ; U4.33@461.65,649 U4.3@528.58,649 ; C71.2@662.13,628.53 662.13,672.53 C69.2@663.13,673.53 ; U6.22@771.51,645.54 801.96,645.54 810.04,653.62 846.52,653.62 pad.7@867.97,675.07 ; U6.20@771.51,684.91 pad.7@858.13,684.91 ; U6.18@771.51,724.28 818.76,724.28 U6.33@820.72,722.32 ; U6.25@799.07,578.61 U6.26@818.76,578.61 818.76,625.86 v3(826.77,633.86) ; v3(909.45,633.86) 909.45,633.59 897.5,645.54 U6.3@964.42,645.54 ; v1(1472.13,729.53) 1472.13,725.53 1481.13,716.53 C107.2@1504.13,716.53 ; C106.2@1503.13,759.53 1503.13,717.53 C107.2@1504.13,716.53 ; 1504.13,603.53 C93.2@1504.13,636.53 C100.2@1504.13,675.53 C107.2@1504.13,716.53 ; U9.22@1639.51,646.54 1674.11,646.54 1688.72,631.93 1688.72,628.83 1686.76,626.86 U9.26@1686.76,579.62 U9.25@1667.07,579.62 1654.13,566.67 C91.2@1654.13,538.53 ; U9.20@1639.51,685.91 1726.13,685.91 1688.72,723.32 1665.34,723.32 1663.37,725.28 U9.18@1639.51,725.28 ; v1(1760.13,455.53) v1@1761.13,455.53 ; v3(1775.59,633.86) 1778.18,633.86 1765.5,646.54 U9.3@1832.42,646.54 ; L30.1@1885.13,1261.53 1887.13,1259.53 v1(1920.13,1259.53) ; v1(1894.13,776.53) 1900.74,769.91 1927.74,769.91 C124.2@1940.13,757.53 C122.2@1940.13,711.53 1940.13,667.53 C121.2@1941.13,666.53 1941.13,619.53 C116.2@1940.13,618.53 C111.2@1940.13,572.53 C115.2@1940.13,527.53 C108.2@1940.13,483.53 1917.13,460.53 v1(1910.13,460.53) ; U10.22@2069.57,646.54 2103.11,646.54 2118.78,630.87 2118.78,628.83 2116.81,626.86 U10.26@2116.81,579.61 U10.25@2097.13,579.61 2077.21,579.61 2070.13,572.53 C110.1@2070.13,543.53 2071.13,542.53 C117.2@2071.13,500.53 ; U10.20@2069.57,685.91 2096.67,685.91 2103.62,692.87 2172.98,692.87 2182.82,683.03 2182.82,669.11 U10.33@2177.9,664.19 ; U10.18@2069.57,725.28 2097.37,725.28 2099.34,723.32 2118.78,723.32 2122.05,726.58 U10.33@2122.05,728.35 ; v3(2212.6,637.8) 2212.6,629.5 2213.27,628.83 2230.98,646.54 U10.3@2262.48,646.54 ; v1(2313.13,154.53) 2313.72,153.93 U11.1@2313.72,106.04 ; v1(2386.13,156.53) 2388.53,158.93 U11.4@2388.53,200.53 ; v1(2512.13,149.53) 2513.32,148.33 U12.1@2513.32,106.53 ; v1(2588.13,158.53) U12.4@2588.13,201.02 ; U7.3@2598.61,944.53 2598.61,894.53 2649.13,894.53 v1(2650.13,895.53) ; 2619.13,2064.53 2649.48,2064.53 2661.48,2076.53 2661.48,2121.7 2649.67,2133.51 v1(2637.86,2133.51) ; v1(2713.13,148.53) 2713.13,146.53 2713.72,145.93 U13.1@2713.72,106.04 ; v1(2720.54,2098.08) v1@2721.17,2097.45 ; v1(2788.13,160.53) 2788.53,160.93 U13.4@2788.53,200.53 ; U14.1@2912.72,105.53 2914.13,106.93 v1(2914.13,149.53) ; R15.1@2957.13,477.53 v1(2957.13,503.53) ; v1(2987.53,165.93) U14.4@2987.53,200.02 ; v1(3111.53,150.93) 3111.72,150.93 U15.1@3111.72,107.04 ; v1(3186.13,162.53) 3186.13,201.13 U15.4@3186.53,201.53 ; v6(3413.39,1393.7) M2.9@3413.39,1472.44 ; R21.1@3531.13,559.53 3531.73,559.53 3563.06,590.85 3563.06,665.42 3590.55,692.91 M2.13@3590.55,751.97 ; v6(3531.5,1397.64) M2.7@3531.5,1472.44 M2.6@3590.55,1472.44
  L1 w12: v1(180.13,684.53) 207.13,684.53 C51.2@207.13,718.53 C53.2@207.13,761.53 ; L9.1@198.13,1261.53 215.13,1244.53 v1(243.13,1244.53) ; v1(200.13,1460.53) 200.13,1420.53 L5.1@197.13,1417.53 197.75,1418.15 248.5,1418.15 L6.1@249.13,1417.53 ; U4.22@335.67,649 367.17,649 384.88,631.28 372.13,618.53 372.13,591.53 381.13,582.53 U4.25@365.19,582.12 ; U4.20@335.67,688.37 422.28,688.37 pad.6@432.13,678.53 ; U4.18@335.67,727.74 382.91,727.74 393.7,716.95 U4.33@393.7,716.54 ; L8.1@455.13,1362.53 491.13,1362.53 v1(493.13,1364.53) ; U4.33@461.65,649 476.8,633.86 v3(472.44,633.86) ; v1(603.13,1417.53) 603.13,1416.53 L11.1@644.13,1416.53 ; v1(631.13,707.53) 633.13,705.53 633.13,688.53 641.13,680.53 C69.2@663.13,680.53 ; L15.1@646.13,1260.53 615.13,1260.53 606.13,1269.53 606.13,1416.53 L11.1@644.13,1416.53 ; C69.2@663.13,673.53 C69.2@663.13,680.53 ; C70.2@663.13,757.53 663.13,717.53 C69.2@663.13,680.53 ; L12.1@698.13,1416.53 L11.1@644.13,1416.53 ; v1(742.13,532.53) v1@743.13,533.53 ; pad.7@858.13,684.91 pad.7@867.97,675.07 ; L14.1@905.13,1420.53 937.13,1420.53 v1(938.13,1421.53) ; v1(1035.13,1203.53) 1036.13,1202.53 L21.1@1068.13,1202.53 ; v1(1043.13,1412.53) 1044.13,1413.53 L17.1@1071.13,1413.53 L18.1@1127.13,1413.53 ; v1(1090.13,787.53) C89.2@1090.13,762.53 C87.2@1090.13,721.53 C88.2@1090.13,681.53 1090.13,641.53 C86.2@1091.13,640.53 ; U8.22@1208.67,646 1275.6,646 pad.8@1305.13,675.53 ; U8.20@1208.67,685.37 1295.28,685.37 pad.8@1305.13,675.53 ; U8.18@1208.67,724.74 1255.91,724.74 1260.18,720.47 v3(1267.72,720.47) ; U8.25@1236.23,579.07 U8.26@1255.91,579.07 1255.91,626.32 1259.52,629.92 1263.78,629.92 1267.72,633.86 v3(1267.72,637.8) ; L20.1@1341.13,1414.53 1375.13,1414.53 v1(1376.13,1415.53) ; U8.3@1401.58,646 1334.65,646 pad.8@1305.13,675.53 ; v1(1468.13,1413.53) L23.1@1507.13,1413.53 ; v1(1473.13,1253.53) L27.1@1508.13,1253.53 ; L23.1@1508.13,1412.53 L24.1@1564.13,1412.53 ; C91.2@1654.13,538.53 C91.2@1656.13,538.53 ; L26.1@1812.13,1415.53 L33.1@1877.13,1415.53 1905.13,1415.53 v1(1905.13,1416.53) ; L32.1@2064.13,1413.53 2081.13,1430.53 2139.13,1430.53 2156.13,1413.53 L29.1@2176.13,1413.53 2212.13,1413.53 2213.13,1412.53 v1(2217.13,1412.53) ; D14.2@2582.13,1387.53 2582.13,1456.53 D15.2@2581.13,1457.53 2581.13,1526.53 P3.12@2626.13,1571.53
  L1 w15: v1(1159.13,239.53) 1159.13,207.02 1165.35,200.79 TS1.5@1192.91,200.79 ; U21.5@1433.13,202.02 v1(1433.13,236.53) ; v1(2445.13,1885.53) 2459.13,1871.53 R39.2@2459.13,1821.53 2456.13,1818.53 R38.2@2456.13,1770.53 ; v1(2503.94,2161.42) 2476.38,2133.86 2476.38,2078.74 2490.59,2064.53 2619.13,2064.53 ; v1@2721.17,2097.45 C16.1@2755.97,2097.45 C17.2@2795.34,2097.45 R37.1@2838.65,2097.45 R120.2@2838.65,2051.46 ; P3.13@2726.13,1571.53 2726.13,1625.53 2753.63,1653.03 C24.2@2762.63,1653.03 ; J7.1@3302.13,764.53 3302.13,725.43 3366.14,661.42 3559.06,661.42 ; 3338.13,105.53 3385.13,58.53 v1(3439.13,58.53) ; v1(3444.13,314.53) 3444.49,314.16 U2.1@3474.32,314.16 ; R7.1@3525.13,150.53 3532.13,150.53 3550.13,132.53 ; v1(3574.13,134.53) 3573.13,134.53 3571.13,132.53 3549.26,132.53 3526.13,155.66 3526.13,171.39 3545.27,190.53 3580.13,190.53 v1(3582.13,188.53)
  L1 w30: v1(1357.13,107.53) U21.1@1395.72,107.53 ; 1447.64,1753.15 1425.2,1775.59 1425.2,1897.64 1444.88,1917.32 1862.2,1917.32 1908,1871.53 pad.0@1987.13,1871.53 pad.0@2096.13,1871.53 2096.13,1965.53 C22.2@2078.13,1983.53 ; 1449.21,1755.91 P5.1@1539.37,1755.91 ; C10.2@3705.13,251.53 3763.84,251.53 ; v1(3763.84,306.74) 3763.84,251.53 ; C8.2@3824.13,251.53 3763.84,251.53
  L2 w10: v1@3108.13,147.53 v1(3111.53,150.93)
  L2 w12: v1@1042.13,1412.53 v1(1043.13,1412.53)
  L4 w8: v1@2544.13,1304.53 2573.95,1304.53 2589.04,1289.44 U5.20@2589.04,1208.67
  L4 w10: C41.1@248.13,532.53 281.13,532.53 C29.2@282.13,533.53 ; v1@489.13,1187.53 v1(493.13,1191.53) ; C63.2@661.13,650.53 662.13,649.53 C57.2@662.13,608.53 ; v1(1472.13,729.53) 1481.13,738.53 C105.2@1503.13,738.53 1504.13,737.53 C104.2@1504.13,696.53 C97.2@1504.13,655.53 1503.13,654.53 C95.2@1503.13,567.53 ; U19.3@1735.53,454.53 1761.13,454.53 v1(1760.13,455.53) ; v1(1894.13,776.53) 1913.39,757.27 1913.39,727.27 1929.13,711.53 C123.2@1940.13,711.53 ; C113.2@2152.13,512.53 2166.13,498.53 2218.13,498.53 ; U20.3@2181.93,459.02 2186.44,463.53 2206.13,463.53 2218.13,475.53 2218.13,498.53 ; v1(2283.13,563.53) 2252.13,532.53 C112.2@2252.13,526.53 2252.13,515.53 2235.13,498.53 2218.13,498.53 ; U5.9@2486.13,999.03 2522.62,999.03 v1(2524.13,997.53) 2535.55,1008.95 2826.77,1008.95 2855.4,980.32 U5.41@2896.13,980.32 ; 2531.56,558.71 C67.2@2531.56,582.74 ; C67.2@2536.72,587.9 C45.1@2577.5,587.9 C45.1@2580.13,590.53 ; Y1.4@2594.51,1957.6 2594.51,1979.93 2632.11,2017.53 ; v1(2637.86,2133.51) 2656.91,2152.57 C13.2@2669.35,2152.57 ; v1(2685.13,1263.53) 2687.13,1261.53 2687.13,1253.53 2687.46,1253.19 U5.25@2687.46,1208.67 ; v1(2697.54,2495.09) C15.2@2736.28,2495.09 2736.91,2495.72 C23.2@2779.59,2495.72 2780.19,2495.72 2820.19,2535.72 C19.2@2822.9,2535.72 ; v1(2700.85,2346.11) 2701.48,2346.74 C12.2@2732.35,2346.74 C14.2@2775.65,2346.74 ; v1(2730.13,643.53) C46.2@2730.13,614.53 C38.2@2781.13,614.53 C40.1@2829.13,614.53 2878.13,614.53 2877.13,615.53 v1(2877.13,639.53) ; v1(2748.09,2436.66) C18.2@2771.72,2436.66 ; v1(2815.02,2184.69) 2815.02,2180.76 2811.09,2180.76 C44.1@2771.72,2220.13 2772.32,2220.13 2811.69,2259.5 C21.2@2815.02,2259.5 ; C34.1@2879.13,613.53 2899.13,613.53 2920.13,592.53 Q2.E@2956.13,592.53 ; C42.2@2992.13,860.53 3003.94,848.72 v1@3003.94,802.72 ; v1@3000.13,806.53 v1(3004.13,806.53) ; v1(3006.13,1130.53) 3005.13,1129.53 3026.13,1108.53 C47.2@3026.13,1069.53 ; Y3.2@3033.02,934.6 3033.02,936.95 3100.01,1003.94 Y3.4@3102.36,1003.94 3110.24,1003.94 3137.8,976.38 v4(3192.91,976.38) ; v1(3072.13,485.53) R16.1@3072.13,513.53 ; D6.A@3244.16,436.66 D6.A@3244.16,452.41 ; J7.1@3302.13,764.53 J7.1@3327.52,764.53
  L4 w12: v1@194.13,1460.53 v1(200.13,1460.53) ; C28.2@206.13,625.53 C36.2@206.13,658.53 ; C32.2@206.13,707.53 C32.2@207.13,706.53 ; C36.2@207.13,659.53 C36.2@206.13,658.53 ; C32.2@207.13,708.53 191.13,708.53 180.13,697.53 v1(180.13,684.53) 179.13,683.53 179.13,662.53 183.13,658.53 C36.2@206.13,658.53 ; C29.2@280.13,531.53 C29.2@281.13,532.53 ; v1(282.13,556.53) C29.2@282.13,533.53 282.13,511.53 290.13,503.53 C30.2@290.13,490.53 ; v1(362.13,505.53) 364.13,507.53 C39.2@364.13,532.53 ; C27.2@453.13,487.53 453.13,486.53 440.13,473.53 U16.3@440.13,434.02 482.61,434.02 493.13,444.53 v1(493.13,451.53) 510.58,451.53 523.62,464.57 523.62,504.03 C33.2@494.13,533.53 ; v1(612.13,552.53) 613.2,552.53 622.2,561.53 C56.2@661.13,561.53 ; v1(631.13,707.53) 637.13,701.53 637.13,691.53 C59.2@661.13,691.53 ; C63.2@661.13,650.53 C59.2@661.13,691.53 ; C62.2@661.13,742.53 C59.2@661.13,691.53 ; C37.1@702.13,525.53 735.13,525.53 v1(742.13,532.53) 772.13,532.53 C64.2@773.13,533.53 C60.2@773.13,496.53 773.13,481.53 783.13,471.53 834.13,471.53 853.13,490.53 C61.2@858.13,490.53 ; v1(805.13,380.53) 805.53,380.93 U17.3@805.53,434.53 ; v1(1035.13,1203.53) v1@1035.13,1204.53 ; C78.2@1090.13,562.53 1090.13,619.53 C74.2@1091.13,620.53 1090.13,621.53 C75.2@1090.13,660.53 C80.2@1090.13,701.53 C82.2@1090.13,741.53 v1(1090.13,787.53) ; C79.2@1234.13,516.53 1234.13,604.53 1259.52,629.92 1263.78,629.92 1267.72,633.86 v3(1267.72,637.8) ; C81.2@1323.13,499.53 1309.53,485.93 1305.53,459.53 1393.13,459.53 ; C77.2@1404.13,459.53 1427.13,459.53 v1(1428.13,460.53) ; v1(1598.13,518.53) 1598.13,503.53 1603.13,498.53 C96.2@1658.13,498.53 ; C99.2@1852.13,496.53 1852.13,481.53 1873.13,460.53 v1(1910.13,460.53) ; v1(2543.13,1303.53) v1@2544.13,1304.53 ; 2632.11,2017.53 Y1.2@2674.13,2017.53 ; v1(2842.51,2370.07) 2838.99,2370.07 2838.65,2369.73 2858.33,2369.73 ; C20.2@2858.33,2346.11 2858.33,2369.73 ; C11.2@2858.33,2396.66 2858.33,2369.73 ; D6.A@3244.16,436.66 3272.93,407.89 3272.93,356.71 3315.11,314.53 v1(3444.13,314.53)
  L4 w15: v1(2445.13,1885.53) 2544.13,1885.53 2571.6,1913 2616.23,1913 2616.23,1934.67 2602.63,1948.26 ; v1(2503.94,2161.42) 2547.24,2118.11 2547.24,2102.02 C25.2@2625.42,2102.02 ; Y1.2@2678.99,2024.53 Y1.2@2681.13,2024.53
  L4 w20: C125.1@410.35,1097.53 467.51,1097.53 Y2.2@489.13,1119.14 v1@489.13,1187.53 ; C67.2@2536.72,587.9 2531.56,582.74 v1(2531.56,523.28) 2531.56,479.97 2618.17,393.35 S1.2@2618.17,385.83
  other v3: 2125.98,629.92 1696.85,633.86 389.76,637.8 389.76,716.54 472.44,716.54 1775.59,716.54 2122.05,716.54 2212.6,716.54 826.77,720.47 909.45,720.47 1346.46,720.47 1692.91,720.47
  other v5: 2711.35,1840.17 2758.59,1840.17 2711.35,1887.41 2758.59,1887.41
  other v7: 1342.52,637.8
NetBT1_1: BT1.1 D4.A R10.1 R11.2 R12.2 | length 1791.3
  L1 w15: BT1.1@2121.8,153.2 BT1.1@2123.13,154.53 ; v1(3307.13,572.53) 3320.13,559.53 R12.2@3364.13,559.53
  L1 w20: D4.A@2000.06,153.2 BT1.1@2121.8,153.2
  L2 w15: BT1.1@2123.13,154.53 2199.13,230.53 2838.13,230.53 2867.13,259.53 2867.13,477.53 2937.13,547.53 3282.13,547.53 v1(3307.13,572.53)
  L4 w15: R11.2@3307.13,527.53 v1(3307.13,572.53) 3307.13,609.53 3312.13,614.53 R10.1@3312.13,644.53 R10.1@3311.13,643.53
NetC7_1: C7.1 L2.1 U2.2 | length 995
  L1 w20: v1(3464.63,239.81) 3467.91,236.53 C7.1@3498.13,236.53 3498.13,262.53 3511.13,275.53 U2.2@3511.13,313.57
  L1 w30: v1(3878.02,385.48) 3878.02,480.69 L2.1@3880.87,483.54
  L4 w20: v1(3464.63,239.81) 3466.91,237.53 3598.13,237.53
  L4 w30: 3598.13,237.53 3646.13,189.53 3646.13,134.53 3686.13,94.53 3846.91,94.53 3878.02,125.64 v1(3878.02,385.48)
NetC7_2: C7.2 D5.K R14.1 | length 340.4
  L1 w15: D5.K@3323.13,310.53 3391.13,310.53 3409.13,328.53 ; R14.1@3409.13,372.53 3409.13,328.53 ; C7.2@3498.13,190.53 3492.15,196.5 3444.15,196.5 3409.13,231.53 3409.13,328.53
NetC11_1: C11.1 C12.1 C14.1 L3.2 R23.2 R24.2 R25.2 R26.2 U3.1 U3.19 | length 1136
  L1 w8: U3.1@2784.18,1942.53 2794.13,1952.47 v1(2794.13,1978.53) ; U3.19@2813.71,1814.58 2881.08,1814.58 v1(2892.13,1803.53)
  L2 w8: v1@2793.13,1978.53 2793.13,1883.76 2873.35,1803.53 v1(2892.13,1803.53)
  L4 w8: 2725.13,2140.73 2751.69,2114.17 2811.09,2114.17 ; L3.2@2725.13,2157.53 2725.13,2299.52 C12.1@2732.35,2306.74 C14.1@2775.65,2306.74 R25.2@2815.02,2346.11 2815.02,2393.35 C11.1@2858.33,2436.66 2866.2,2444.54 R24.2@2866.2,2495.09 ; v1(2794.13,1978.53) 2811.09,1995.49 2811.09,2114.17 ; R26.2@2858.33,2219.5 2858.33,2161.42 2811.09,2114.17